# Altium PCB Template2.PcbDoc (part 1 of 2)
Units mm, origin at the board's own origin, x right, y up, seen from the top; angles counter-clockwise.
Board outline 93 x 70 mm, 4 copper layers (Top Layer, InternalPlane1, InternalPlane2, Bottom Layer), stack 1.963 mm thick; 187 components, 125 nets, 602 pads, 560 vias.
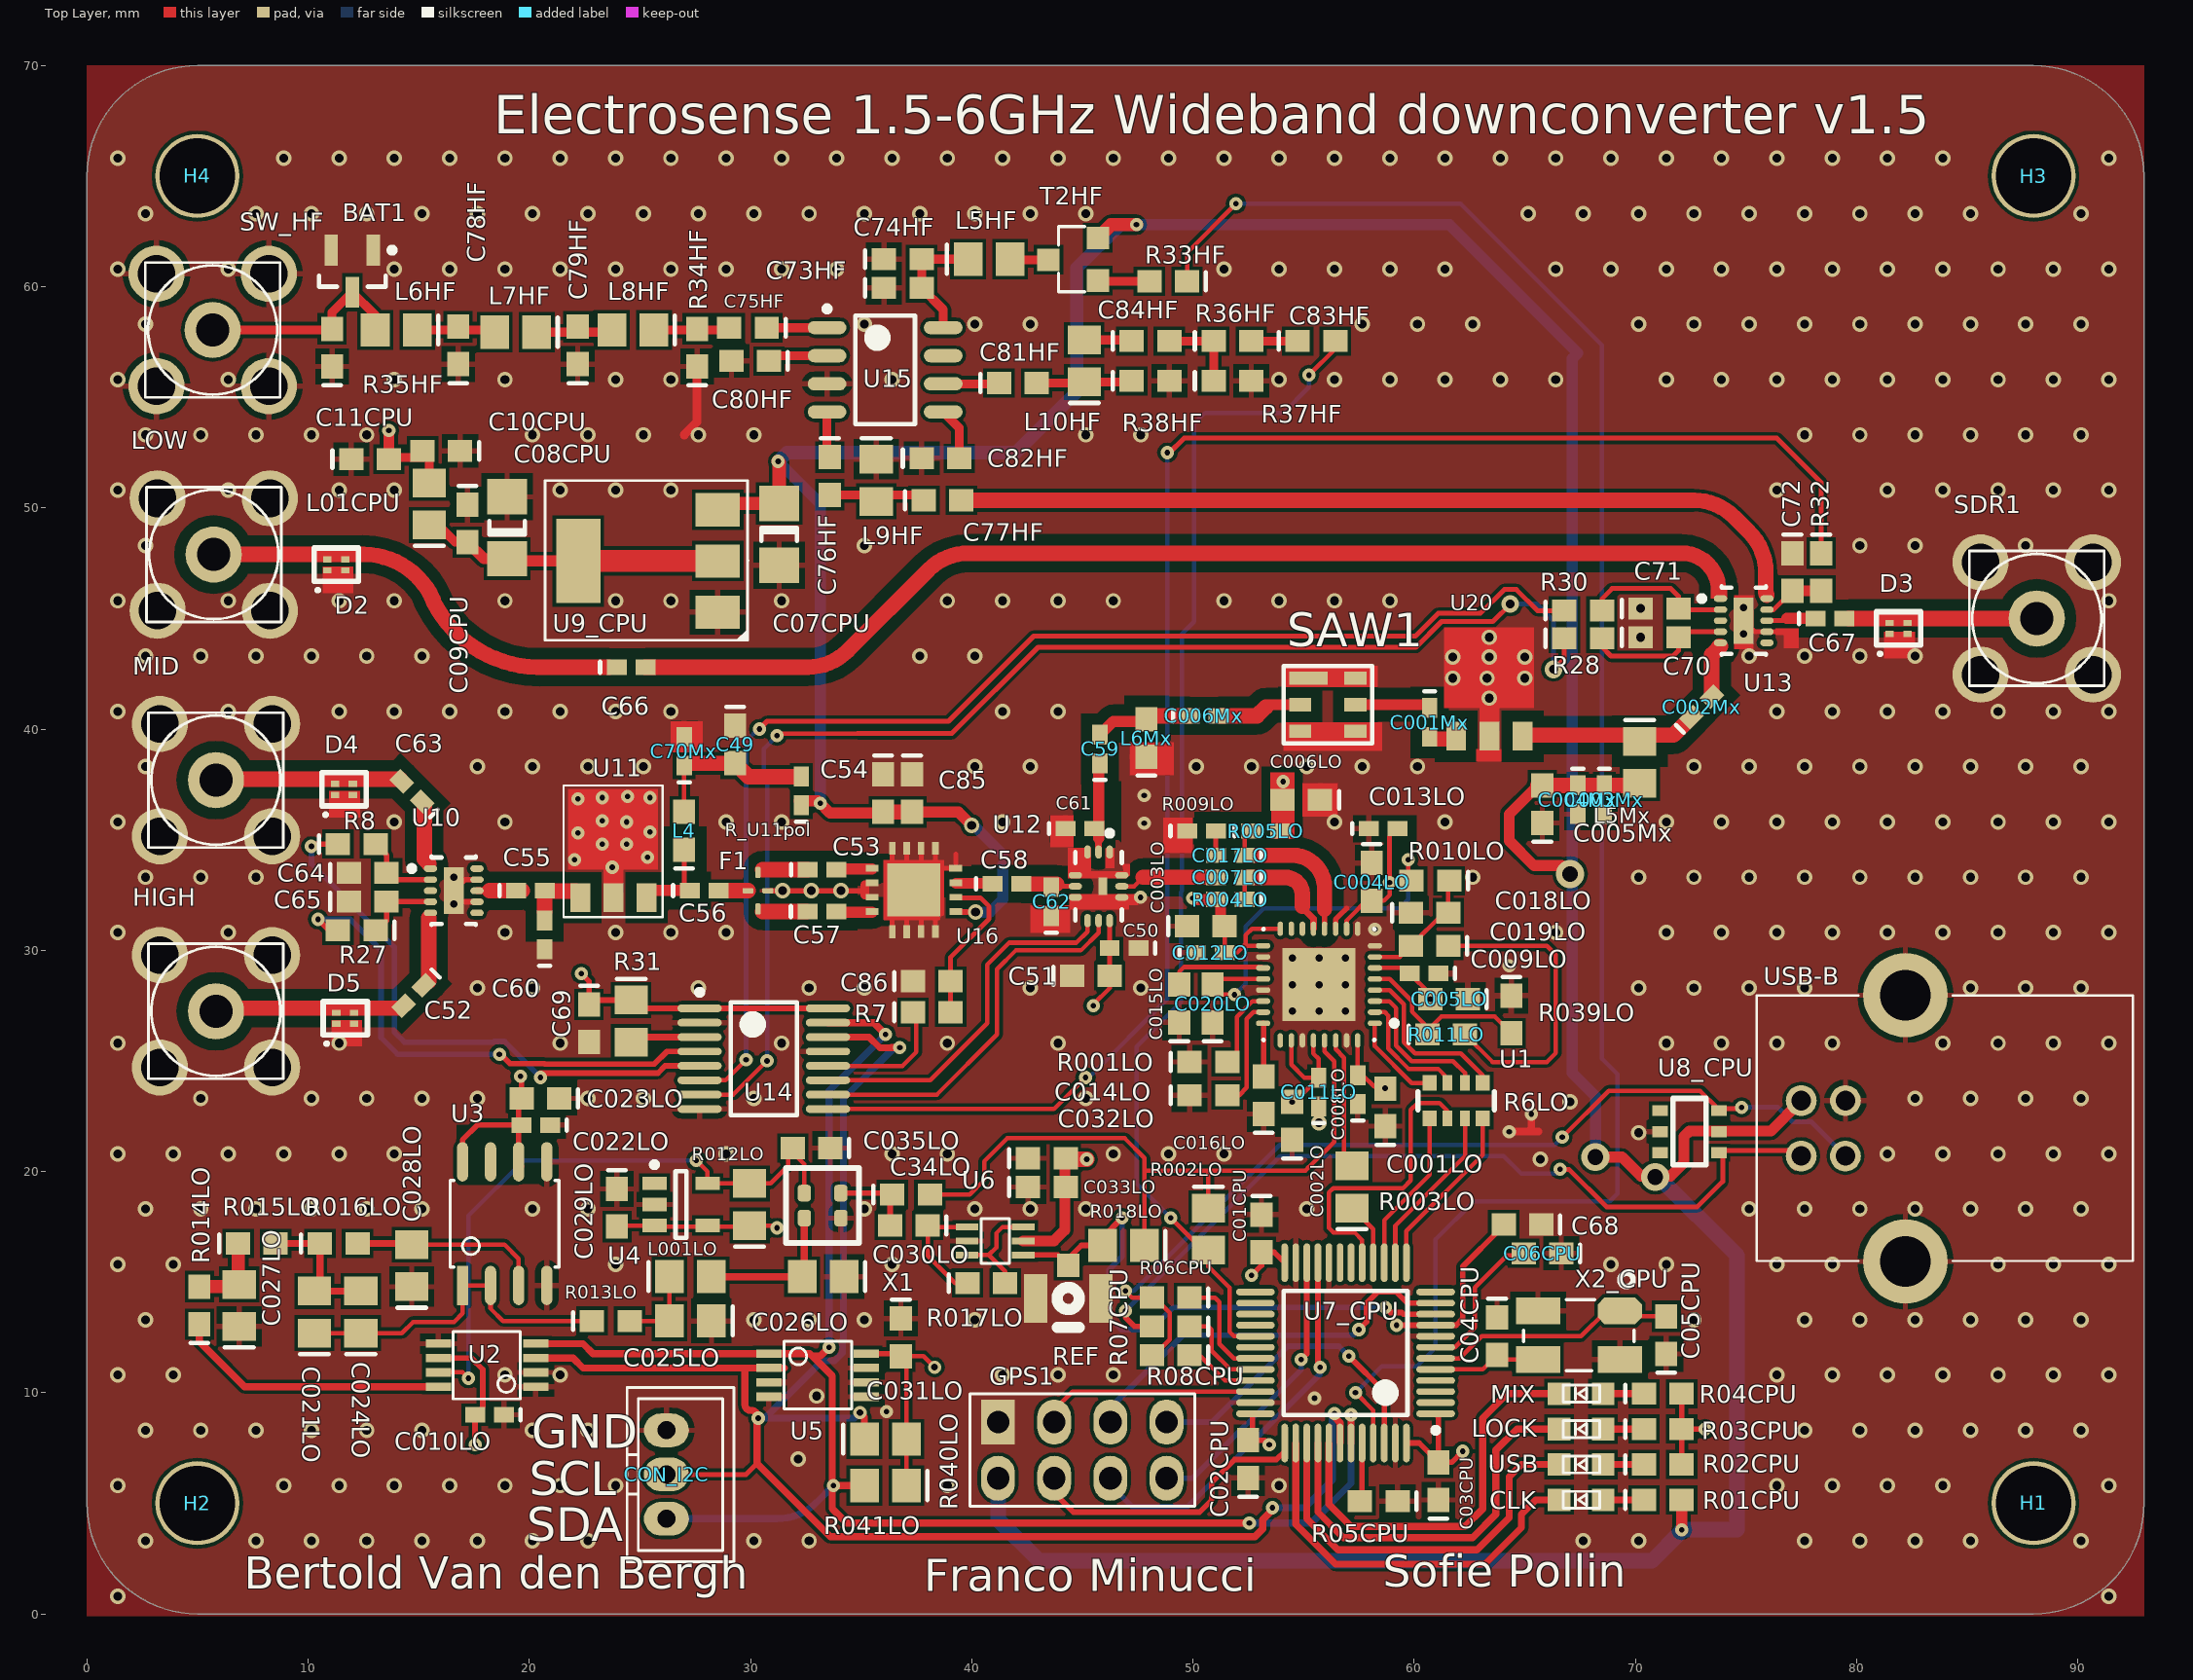
[diagram p0: Top Layer view]
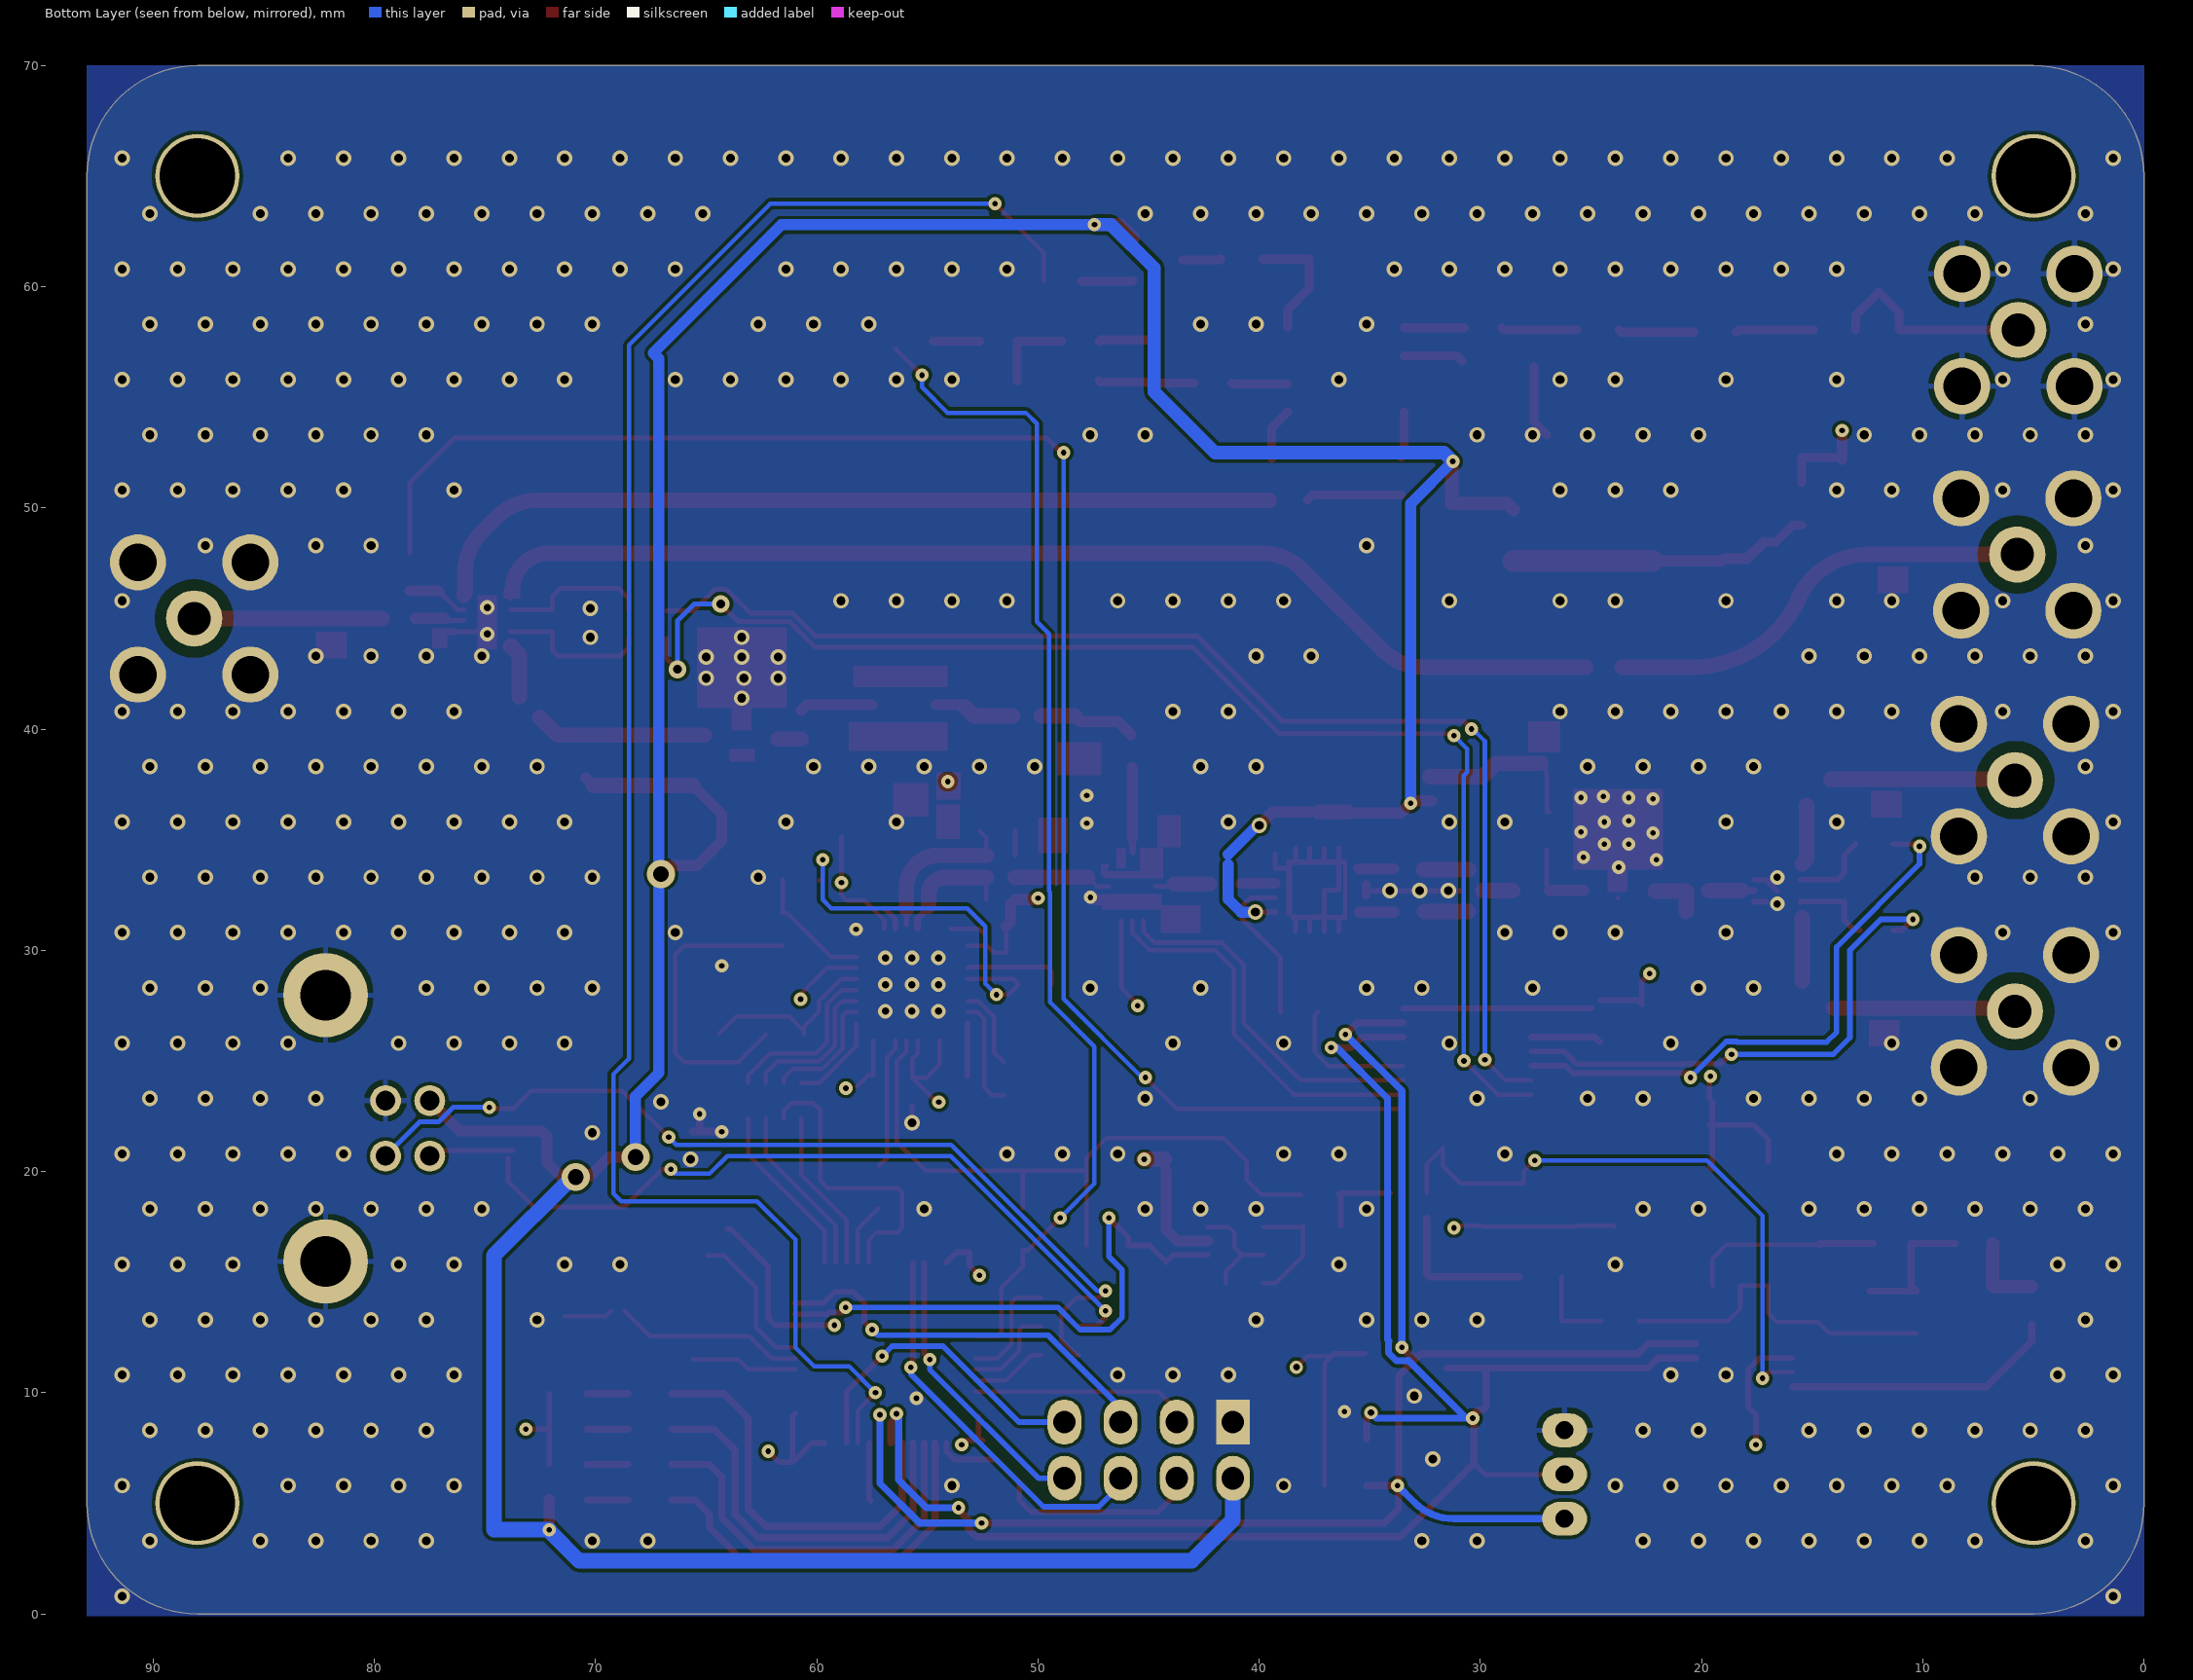
[diagram p1: Bottom Layer view, seen from below]
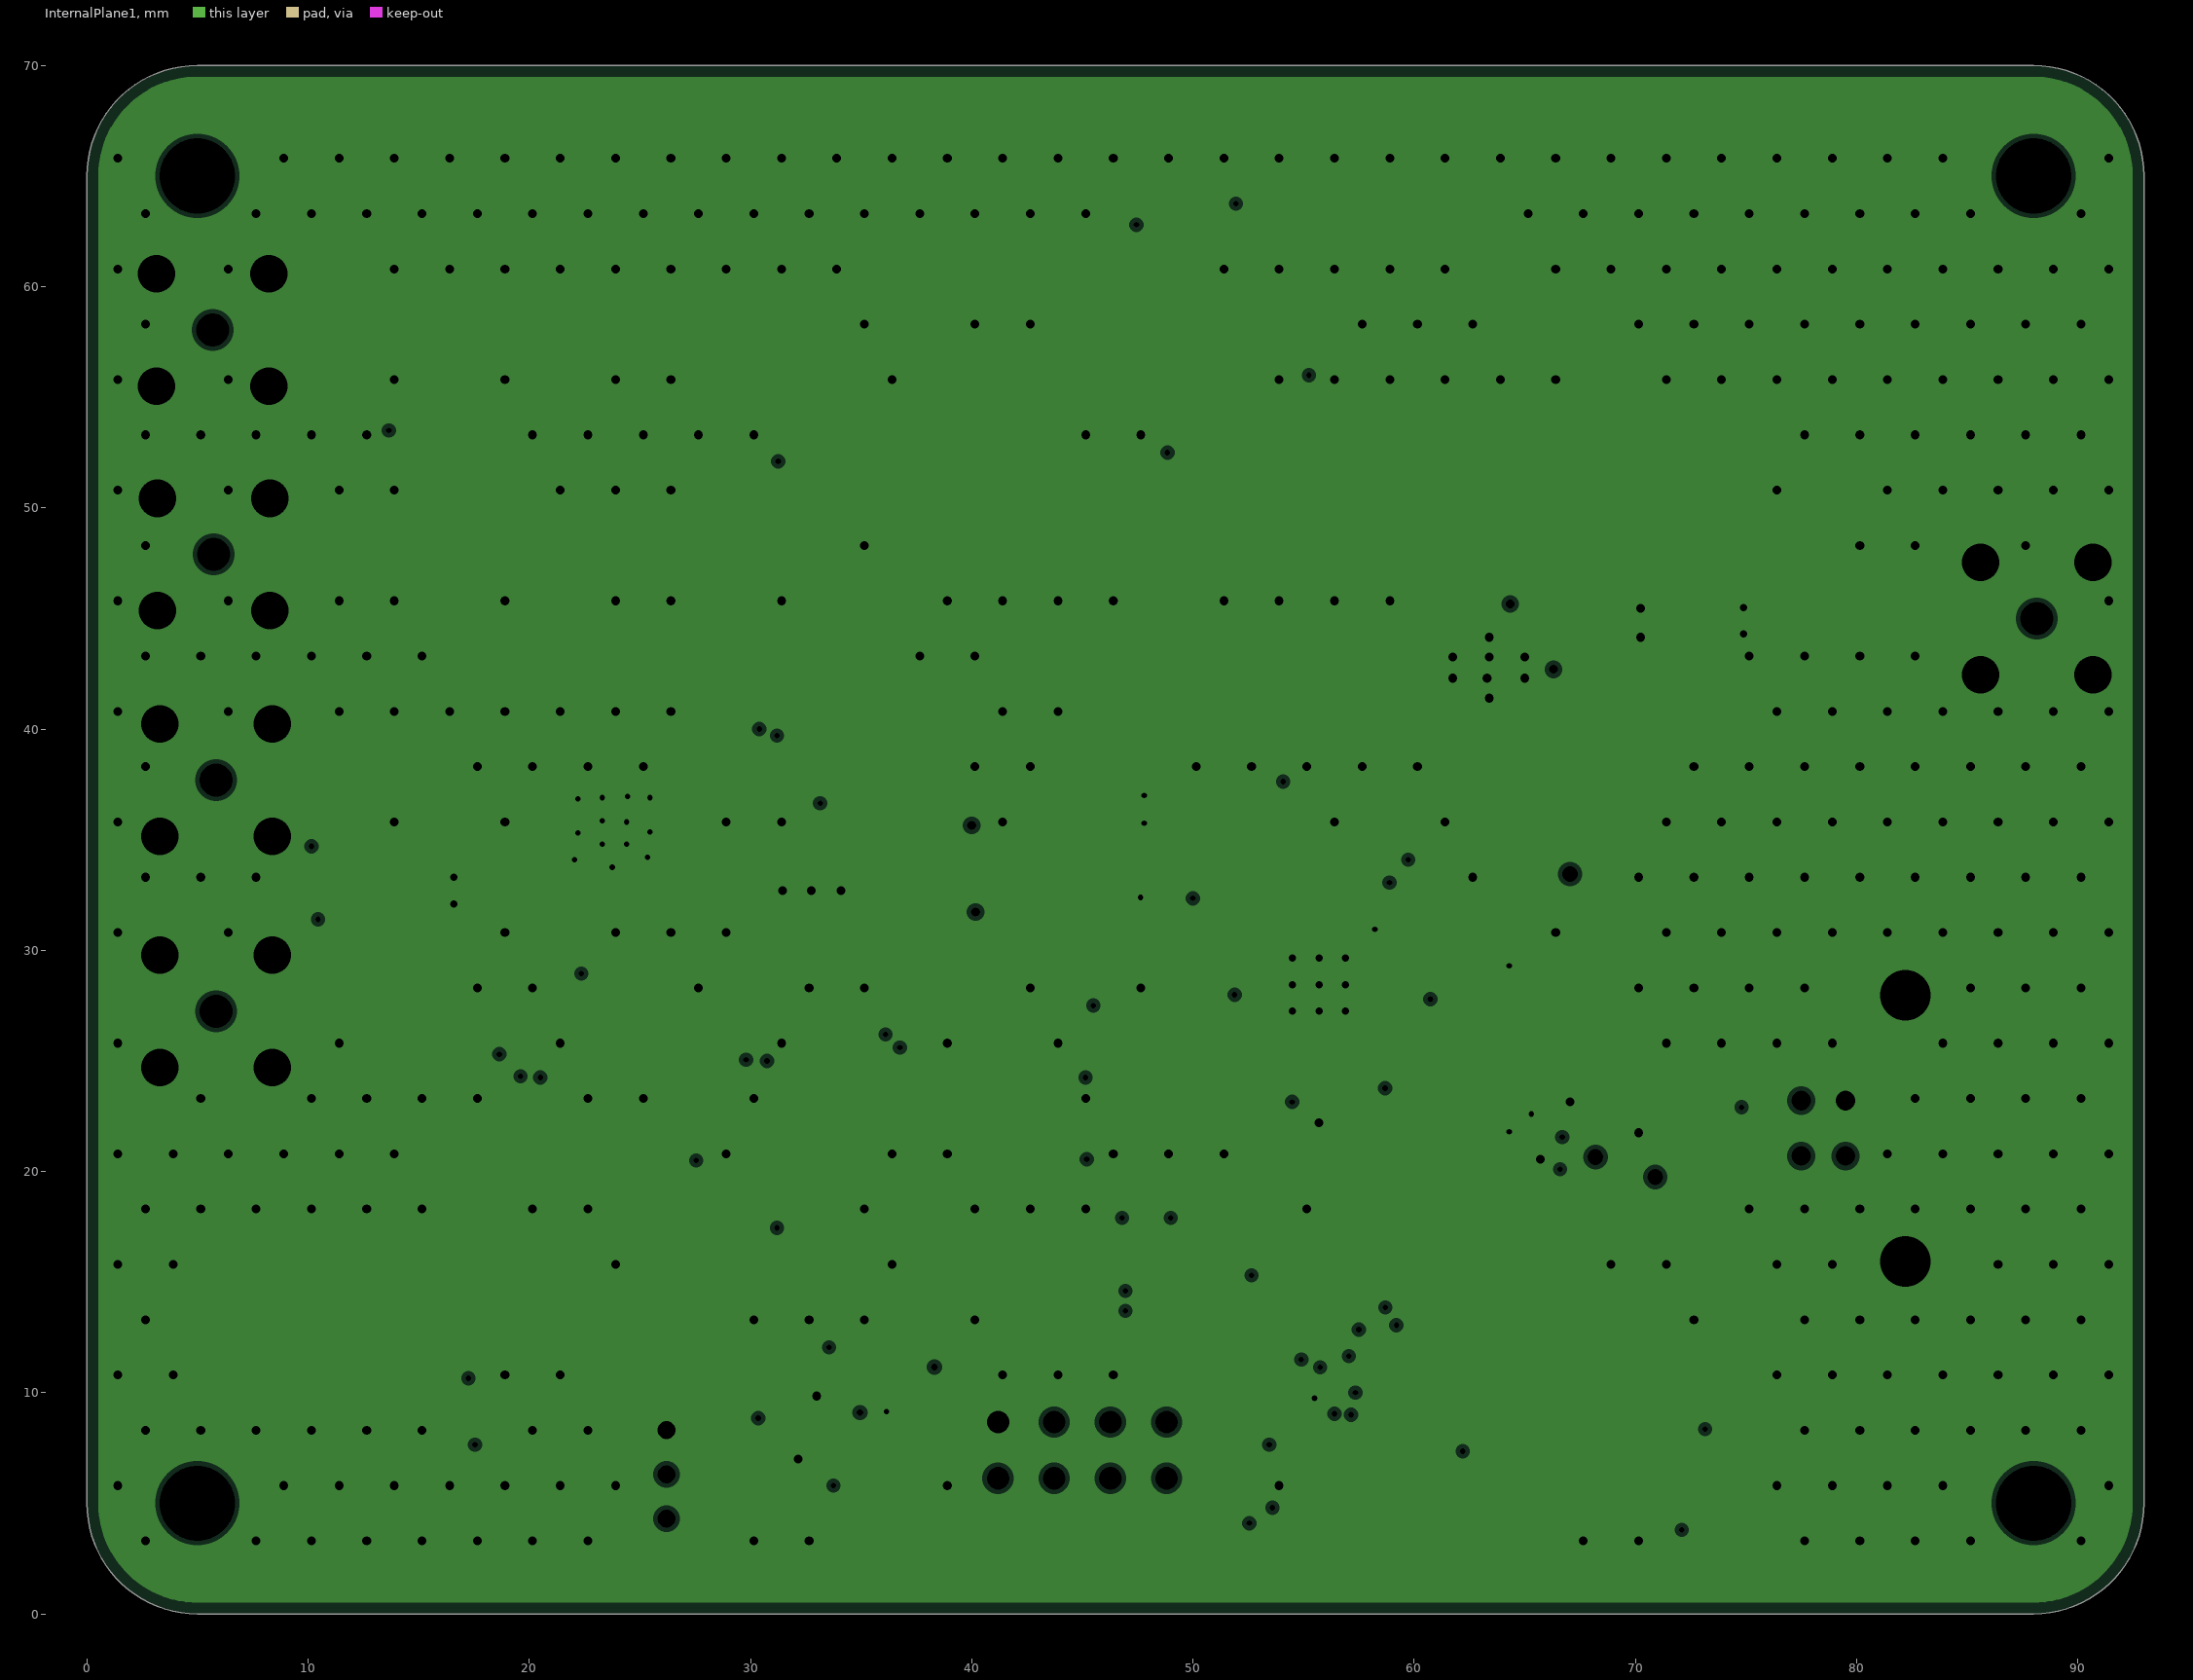
[diagram p2: InternalPlane1, clearances drawn from the general rule]
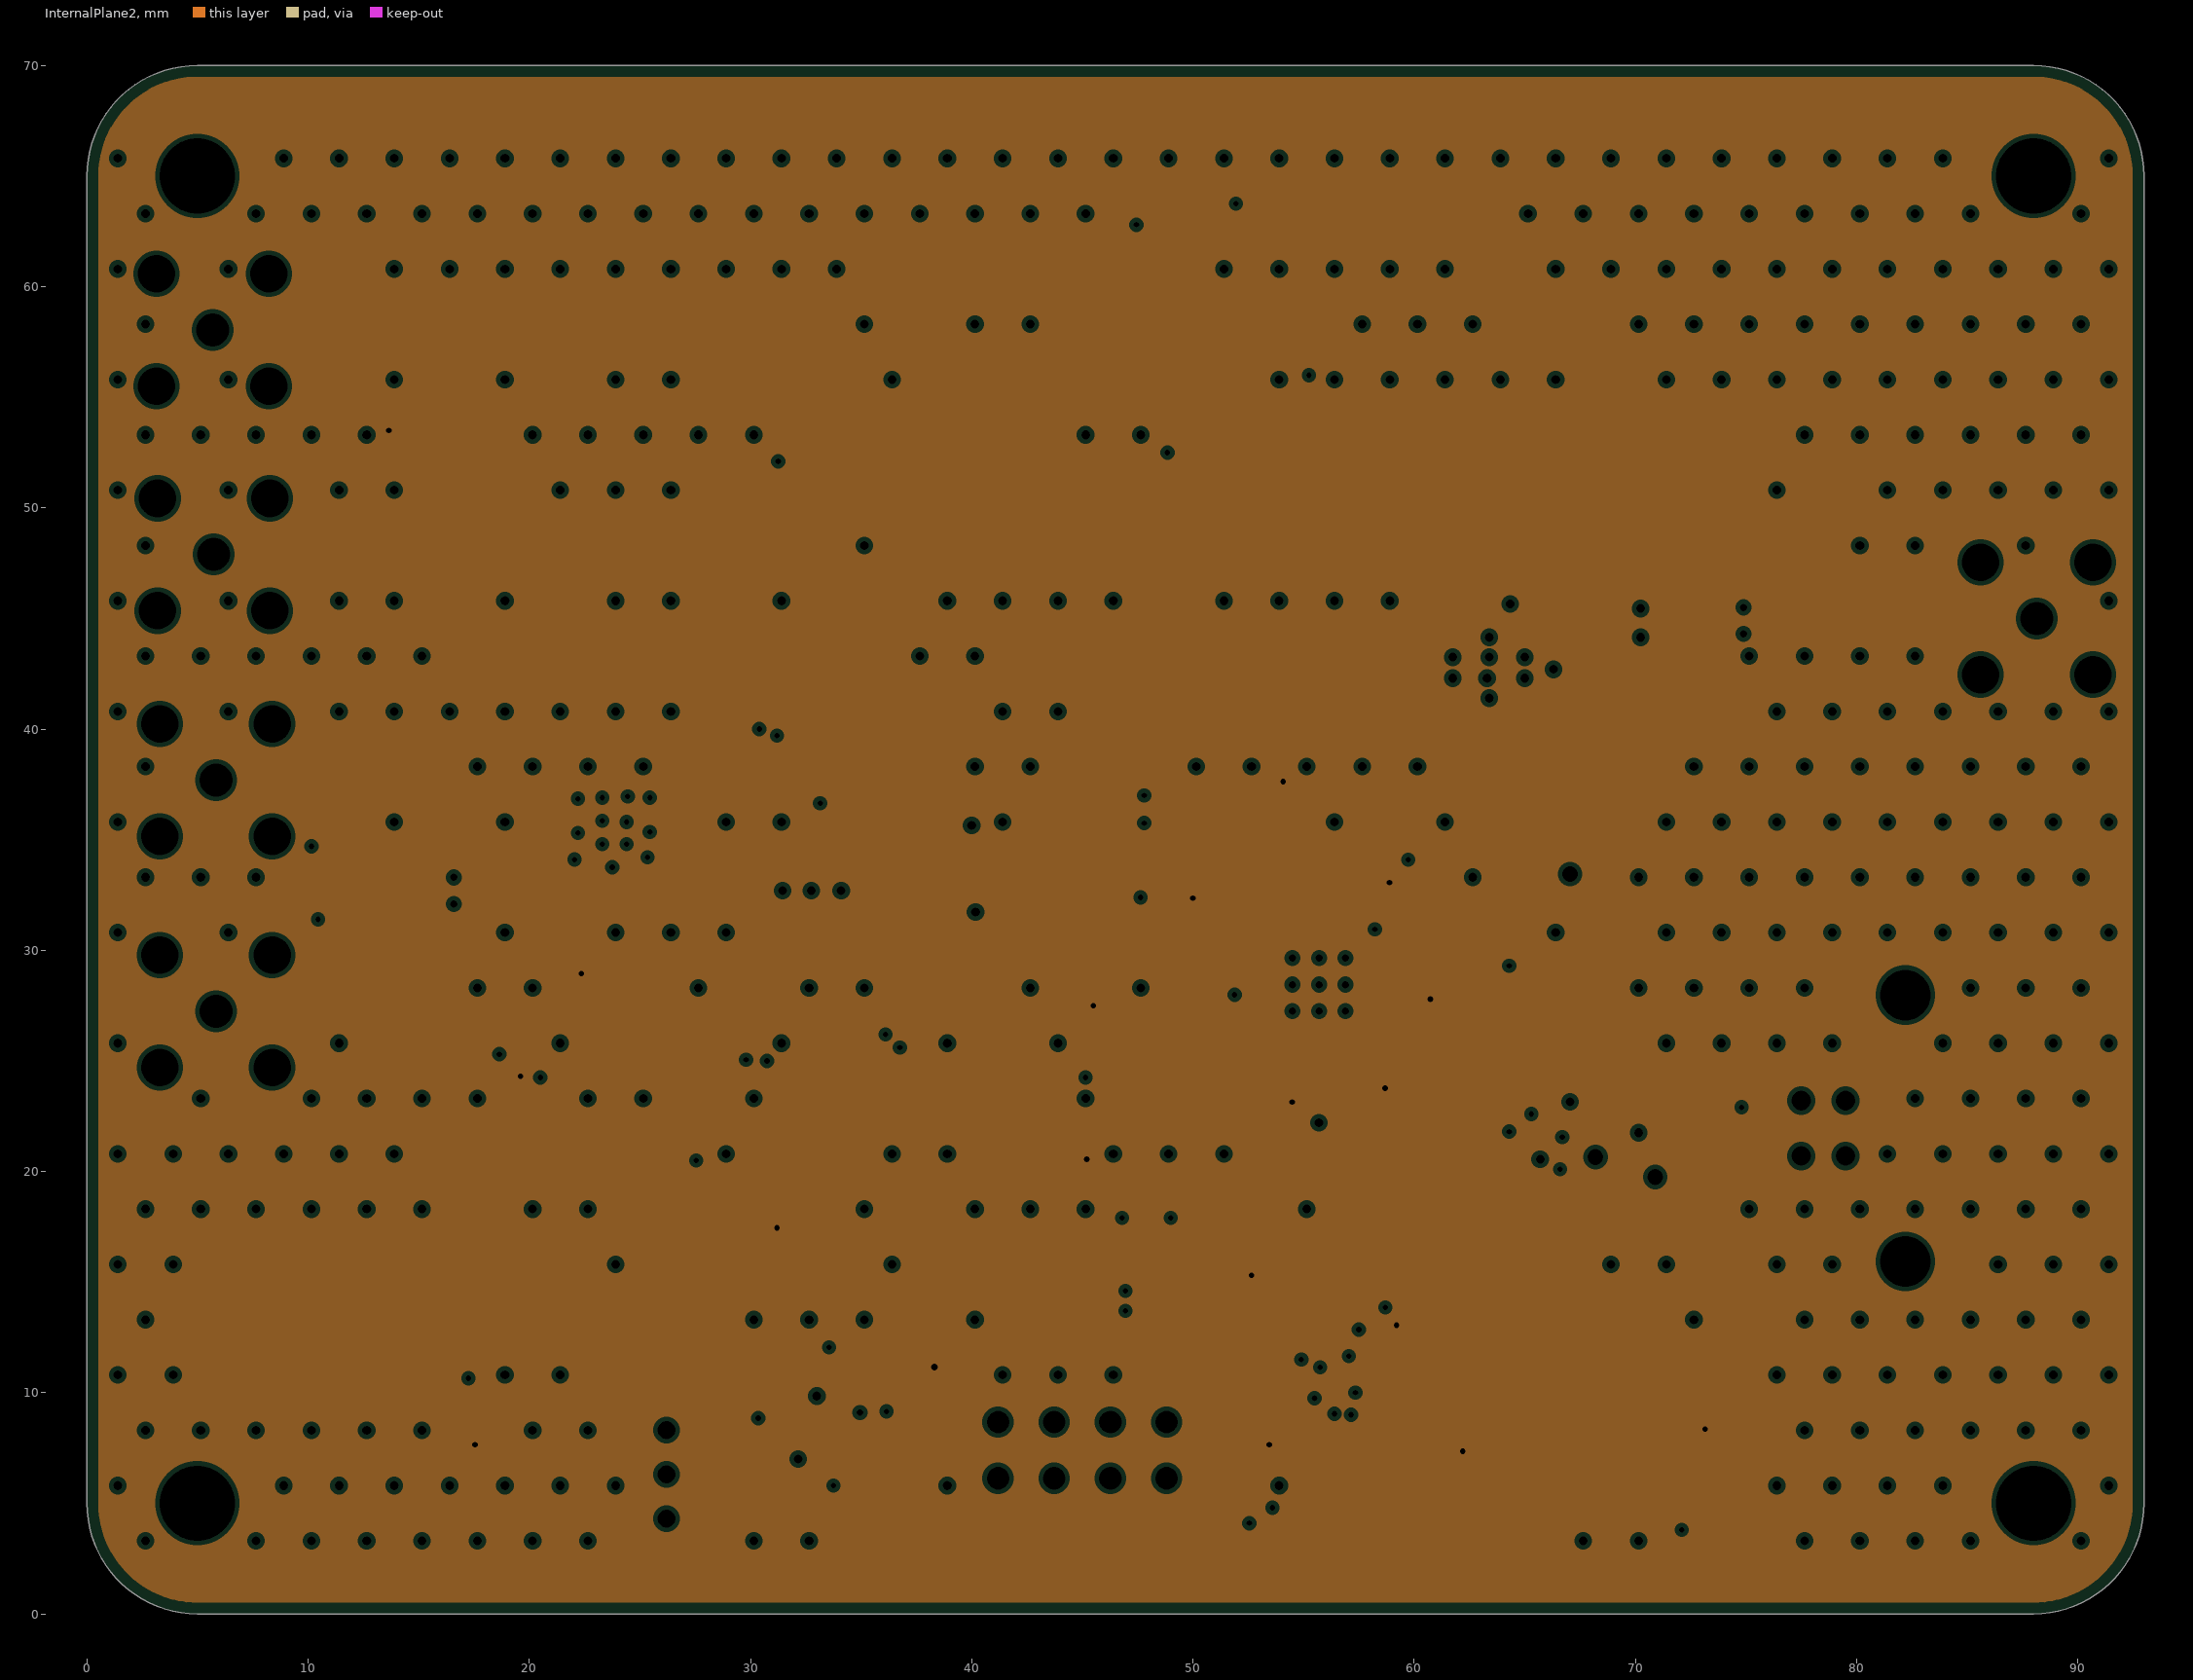
[diagram p3: InternalPlane2, clearances drawn from the general rule]

## Layer stack, top to bottom
Top Solder: solder mask 0.0102, Solder Resist, Dk 3.5
Top Layer: signal copper 0.0356
Dielectric1: core 0.36, FR-4, Dk 4.8
InternalPlane1: plane copper 0.036, net GND
Dielectric5: prepreg 1.1, FR-4, Dk 4.8
InternalPlane2: plane copper 0.036, net 3V3
Dielectric6: core 0.36, FR-4, Dk 4.8
Bottom Layer: signal copper 0.0356
Bottom Solder: solder mask 0.0102, Solder Resist, Dk 3.5

## Board outline
0,5 0,65 cw(c5,65) 5,70 88,70 cw(c88,65) 93,65 93,5 cw(c88,5) 88,0 5,0 cw(c5,5)

## Design rules (kind name [scope] priority, off if disabled: settings)
Clearance Clearance_1 [(InPolygon) vs InNetClass('RF')] p1: gap=0.5 ignorepadtopadclearanceinfootprint=FALSE except(0: Arc-Hole Track-Hole SMDPad-Hole THPad-Hole Via-Hole Fill-Hole Poly-Hole Region-Hole Text-Hole)
Clearance [All] p2: gap=0.15 ignorepadtopadclearanceinfootprint=FALSE except(0: Arc-Hole Track-Hole SMDPad-Hole THPad-Hole Via-Hole Fill-Hole Poly-Hole Region-Hole Text-Hole)
DiffPairsRouting [(InDifferentialPairClass('All Differential Pairs'))] p1: maxlimit=0.254 minlimit=0.254 mostfreqgap=0.254 toplayer_minwidth=0.381 toplayer_maxwidth=0.381 toplayer_prefwidth=0.381 bottomlayer_minwidth=0.381 bottomlayer_maxwidth=0.381 bottomlayer_prefwidth=0.381 maxuncoupledlength=12.7
HoleSize [All] p1: absolutevalues=TRUE maxlimit=3.5 minlimit=0.025 maxpercent=80.000 minpercent=20.000
MinimumAnnularRing [All] p1: minimumring=0.125
MinimumSolderMaskSliver [All] p1: minsoldermaskwidth=0
PlaneClearance [All] p1: clearance=0.2
PlaneConnect [All] p1: planeconnectstyle=Direct reliefexpansion=0.508 reliefentries=4 reliefconductorwidth=0.254 reliefairgap=0.254
PolygonConnect PolygonConnect_1 [(InPadClass('Direct') or isVia) vs InNet('GND')] p1: connectstyle=Direct reliefconductorwidth=0.254 reliefentries=4 polygonreliefangle="90 Angle" airgapwidth=0.254
PolygonConnect [All] p2: connectstyle=Relief reliefconductorwidth=0.254 reliefentries=4 polygonreliefangle="90 Angle" airgapwidth=0.254
RoutingVias [All] p1: holewidth=0.4 width=0.8 viastyle="Through Hole" minholewidth=0.25 minwidth=0.6 maxholewidth=2 maxwidth=2.5
SilkToSilkClearance [All] p1 off: silktosilkclearance=0.254
SilkToSolderMaskClearance SilkscreenOverComponentPads [IsPad] p1 off: minsilkscreentomaskgap=0.254 clearancetoexposedcopper=TRUE
SolderMaskExpansion [All] p1: expansion=0
Width [All] p1: maxlimit=2.54 minlimit=0.15 preferedwidth=0.22
23 further rules are at their usual default settings.

## Classes and differential pairs
component class Toplevel: H1 H2 H3 H4
net class RF: LO+ LO- Mixer_switch_in NetC001Mx_1 NetC001Mx_2 NetC002Mx_1 NetC006Mx_1 NetC006Mx_2 NetC52_1 NetC52_2 NetC53_1 NetC53_2 NetC55_1 NetC55_2 NetC56_1 NetC57_1 NetC57_2 NetC58_1 NetC58_2 NetC59_1 NetC63_1 NetC63_2 NetC66_1 NetC66_2 NetC67_1 NetC67_2 RFOUTA+ RFOUTA-
component class U_CPU: C01CPU C02CPU C03CPU C04CPU C05CPU C06CPU C07CPU C08CPU C09CPU C10CPU C11CPU CLK GPS1 L01CPU LOCK MIX R01CPU R02CPU R03CPU R04CPU R05CPU R06CPU R07CPU R08CPU U7_CPU U8_CPU U9_CPU USB USB-B X2_CPU
component class U_LO: C001LO C002LO C003LO C004LO C005LO C006LO C7 C007LO C008LO C009LO C010LO C011LO C012LO C013LO C14 C014LO C15 C015LO C016LO C017LO C18 C018LO C19 C019LO C20 C020LO C021LO C022LO C023LO C024LO C025LO C026LO C027LO C028LO C029LO C030LO C031LO C032LO C033LO C34LO C035LO L001LO R1 R001LO R2 R002LO R3 R003LO R4 R004LO R5 R005LO R6 R6LO R9 R009LO R10 R010LO R11 R011LO R12 R012LO R013LO R014LO R015LO R016LO R017LO R18 R018LO R039LO R040LO R041LO REF U1 U2 U3 U4 U5 U6 X1
component class U_MixerHF: BAT1 C73HF C74HF C75HF C76HF C77HF C78HF C79HF C80HF C81HF C82HF C83HF C84HF L5HF L6HF L7HF L8HF L9HF L10HF R33HF R34HF R35HF R36HF R37HF R38HF SW_HF T2HF U15
component class U_Mixer: C001Mx C002Mx C003Mx C004Mx C005Mx C006Mx C49 C50 C51 C52 C53 C54 C55 C56 C57 C58 C59 C60 C61 C62 C63 C64 C65 C66 C67 C68 C69 C70 C70Mx C71 C72 C85 C86 CON_I2C D2 D3 D4 D5 F1 HIGH L4 L5Mx L6Mx LOW MID R7 R8 R27 R28 R30 R31 R32 R_U11pol SAW1 SDR1 U10 U11 U12 U13 U14 U16 U20
pad class Direct: BAT1-1 BAT1-2 BAT1-3 C49-1 C49-2 C50-1 C50-2 C51-1 C51-2 C52-1 C52-2 C53-1 C53-2 C54-1 C54-2 C55-1 C55-2 C56-1 C56-2 C57-1 C57-2 C58-1 C58-2 C59-1 C59-2 C60-1 C60-2 C62-1 C62-2 C63-1 C63-2 C64-1 C64-2 C65-1 C65-2 C66-1 C66-2 C67-1 C67-2 C68-1 C68-2 C69-1 C69-2 C70-1 C70-2 C71-1 C71-2 C72-1 C72-2 C85-1 C85-2 C86-1 C86-2 CLK-1 CLK-2 D2-1 D2-2 D2-3 D2-4 D3-1 D3-2 D3-3 D3-4 D4-1 D4-2 D4-3 D4-4 D5-1 D5-2 D5-3 D5-4 F1-1 F1-2 F1-3 F1-4 GPS1-1 GPS1-2 GPS1-3 GPS1-4 GPS1-5 GPS1-6 GPS1-7 GPS1-8 H1-0 H2-0 H3-0 H4-0 HIGH-1 HIGH-2 HIGH-3 HIGH-4 HIGH-5 L4-1 L4-2 LOCK-1 LOCK-2 LOW-1 LOW-2 LOW-3 LOW-4 LOW-5 MID-1 MID-2 MID-3 MID-4 MID-5 MIX-1 MIX-2 R7-1 R7-2 R8-1 R8-2 R27-1 R27-2 R28-1 R28-2 R30-1 R30-2 R31-1 R31-2 R32-1 R32-2 REF-0 REF-1 SDR1-1 SDR1-2 SDR1-3 SDR1-4 SDR1-5 U1-1 U1-2 U1-3 U1-4 U1-5 U1-6 U1-7 U1-8 U1-9 U1-10 U1-11 U1-12 U1-13 U1-14 U1-15 U1-16 U1-17 U1-18 U1-19 U1-20 U1-21 U1-22 U1-23 U1-24 U1-25 U1-26 U1-27 U1-28 U1-29 U1-30 U1-31 U1-32 U1-33 U10-1 U10-2 U10-3 U10-4 U10-5 U10-6 U10-7 U10-8 U10-9 U10-10 U10-11 U11-1 U11-2 U11-3 U12-1 U12-2 U12-3 U12-4 U12-5 U12-6 U12-7 U12-8 U12-9 U12-10 U12-11 U12-12 U12-13 U13-1 U13-2 U13-3 U13-4 U13-5 U13-6 U13-7 U13-8 U13-9 U13-10 U13-11 U16-1 U16-2 U16-3 U16-4 U16-5 U16-6 U16-7 U16-8 U16-9 U16-10 U16-11 U16-12 U16-13 U16-14 U16-15 U16-16 U16-17 U20-1 U20-2 U20-3 USB-1 USB-2

## Components (designator, comment, footprint, x,y, rotation, side; value= is the part's Value field where it differs from the comment)
BAT1 "BAT1704WH6327XTSA1" SOT95P230X110-3N 12,60.7 r270 top
C01CPU "100nF" "smd C0603_0.80" 53.1,17.2 r270 top
C001LO "100nF" "smd C0603_0.80" 58.7,22.9 r90 top
C001Mx "CSMD402/100nF" "smd C0402" 60.7,40.3 r270 top
C02CPU "100nF" "smd C0603_0.80" 52.5,7 r90 top
C002LO "100nF" "smd C0603_0.80" 54.486,22.292 r90 top
C002Mx "CSMD402/100nF" "smd C0402" 73,41 r45 top
C03CPU "100nF" "smd C0603_0.80" 61.1,6 r90 top
C003LO "100nF" "smd C0603_0.80" 50.586,31.092 r0 top
C003Mx "CSMD402/1.5nF" "smd C0402" 68.6,36.8 r270 top
C04CPU "10pF" "smd C0603_0.80" 63.75,12.55 r270 top
C004LO "100nF" "smd C0603_0.80" 58.086,33.092 r270 top
C004Mx "CSMD402/100pF" "smd C0402" 67.4,36.8 r270 top
C05CPU "10pF" "smd C0603_0.80" 71.4,12.6 r90 top
C005LO "100nF" "smd C0603_0.80" 61.586,27.792 r180 top
C005Mx "1uF" "smd C0603_0.80" 65.8,36.6 r90 top
C06CPU "100nF" "smd C0603_0.80" 65.8,16.3 r180 top
C006LO "100nF" "smd C0603_0.80" 54.9,36.8 r180 top
C006Mx "CSMD402/100nF" "smd C0402" 50.5,40.6 r0 top
C07CPU "10uF" "smd C1206 polar" 31.3,48.8 r270 top
C007LO "22pF" "smd C0402" 51.686,33.292 r180 top
C08CPU "10uF" "smd C1206 polar" 19,49.1 r90 top
C008LO "10nF" "smd C0402" 57.45,23.7 r90 top
C09CPU "100nF" "smd C0603_0.80" 17.2,49.3 r270 top
C009LO "10nF" "smd C0402" 60.45,28.95 r180 top
C10CPU "100nF" "smd C0603_0.80" 16.025,52.575 r180 top
C010LO "10nF" "smd C0402" 18.2,9 r180 top
C11CPU "10nF" "smd C0603_0.80" 12.8,52.2 r0 top
C011LO "10nF" "smd C0402" 55.686,23.592 r90 top
C012LO "10nF" "smd C0402" 50.786,29.892 r0 top
C013LO "10nF" "smd C0402" 58.6,35.5 r0 top
C014LO "1uF" "smd C0603_0.80" 50.7,23.45 r0 top
C015LO "1uF" "smd C0603_0.80" 49.386,27.592 r90 top
C016LO "1uF" "smd C0603_0.80" 53.2,23.45 r90 top
C017LO "22pF" "smd C0402" 51.686,34.292 r180 top
C018LO "12nF" "smd C0603_0.80" 60.7,31.7 r0 top
C019LO "100nF" "smd C0603_0.80" 60.7,30.2 r180 top
C020LO "820pF" "smd C0603_0.80" 50.886,27.592 r90 top
C021LO "DNP" "smd C0805_1.30" 10.286,13.642 r90 top
C022LO "DNP" "smd C0402" 20.3,22.1 r180 top
C023LO "DNP" "smd C0603_0.80" 20.5,23.3 r180 top
C024LO "DNP" "smd C0805_1.30" 12.386,13.642 r90 top
C025LO "DNP" "smd C0805_0.60" 27.286,13.242 r180 top
C026LO "DNP" "smd C0805_0.60" 33.286,15.242 r180 top
C027LO "DNP" "smd C0805_1.30" 6.886,13.942 r90 top
C028LO "DNP" "smd C0805_0.60" 14.686,15.742 r90 top
C029LO "100nF" "smd C0603_0.80" 23.961,18.357 r270 top
C030LO "DNP" "smd C0603_0.80" 37.161,17.557 r180 top
C031LO "100nF" "smd C0603_0.80" 36.8,12.5 r270 top
C032LO "DNP" "smd C0603_0.80" 43.4,20.6 r0 top
C033LO "DNP" "smd C0603_0.80" 43.4,19.3 r0 top
C34LO "100nF" "smd C0603_0.80" 37.261,18.957 r0 top
C035LO "100nF" "smd C0603_0.80" 32.761,21.057 r180 top
C49 "100nF" "smd C0603_0.80" 29.3,39.3 r270 top
C50 "10nF" "smd C0402" 46.886,30.092 r180 top
C51 "100nF" "smd C0603_0.80" 45.386,28.842 r0 top
C52 "22pF" "smd C0402" 14.775,27.95 r225 top
C53 "22pF" "smd C0402" 33.236,33.642 r0 top
C54 "100nF" "smd C0603_0.80" 36,37.1 r270 top
C55 "22pF" "smd C0402" 20.05,32.692 r0 top
C56 "22pF" "smd C0402" 27.9,32.7 r0 top
C57 "22pF" "smd C0402" 33.225,31.75 r0 top
C58 "22pF" "smd C0402" 41.6,33 r0 top
C59 "100nF" "smd C0402" 45.8,39.1 r90 top
C60 "0.2pF" "smd C0402" 20.7,30.7 r90 top
C61 "DNP" "smd C0402" 44.9,35.5 r0 top
C62 "DNP" "smd C0402" 43.6,32.2 r90 top
C63 "22pF" "smd C0402" 14.7,37.175 r135 top
C64 "47pF" "smd C0603_0.80" 12.7,33.5 r0 top
C65 "47pF" "smd C0603_0.80" 12.7,32.2 r0 top
C66 "100pF" "smd C0402" 24.6,42.8 r0 top
C67 "100pF" "smd C0402" 78.8,45 r0 top
C68 "100nF" "smd C0603_0.80" 64.9,17.6 r180 top
C69 "100nF" "smd C0603_0.80" 22.7,26.7 r270 top
C70 "47pF" "smd C0603_0.80" 71.096,44.15 r0 top
C70Mx "CSMD402/1nF" "smd C0402" 27,39 r90 top
C71 "47pF" "smd C0603_0.80" 71.096,45.45 r0 top
C72 "47pF" "smd C0603_0.80" 77.1,47.1 r270 top
C73HF "10nF" "smd C0603_0.80" 36.886,59.942 r0 top
C74HF "100nF" "smd C0603_0.80" 36.886,61.242 r0 top
C75HF "10nF" "smd C0603_0.80" 29.886,58.142 r180 top
C76HF "47pF" "smd C0603_0.80" 33.586,51.442 r270 top
C77HF "6.8pF" "smd C0603_0.80" 38.686,50.342 r0 top
C78HF "47pF" "smd C0603_0.80" 16.786,57.342 r90 top
C79HF "47pF" "smd C0603_0.80" 22.186,57.342 r90 top
C80HF "10nF" "smd C0603_0.80" 29.986,56.642 r180 top
C81HF "10nF" "smd C0603_0.80" 42.086,55.642 r0 top
C82HF "47pF" "smd C0603_0.80" 38.586,52.242 r0 top
C83HF "47pF" "smd C0603_0.80" 55.586,57.542 r0 top
C84HF "9.1pF" "smd C0603_0.80" 48.086,57.542 r0 top
C85 "47pF" "smd C0603_0.80" 37.3,37.1 r270 top
C86 "47pF" "smd C0603_0.80" 38.2,28.6 r0 top
CLK "DNP" "led HSMH-C190 (Avago Technologies)" 67.546,5.154 r180 top
CON_I2C "CON HDR1X3/JST/B3BPHKS" "con HDR/BNR1x3 (pitch 2mm, JST B3B-PH-K-S)" 26.835,6.3 r270 top
D2 "ESD0P8RFL" ESD0P8RFL 11.275,47.425 r270 top
D3 "ESD0P8RFL" ESD0P8RFL 81.9,44.55 r270 top
D4 "ESD0P8RFL" ESD0P8RFL 11.625,37.275 r270 top
D5 "ESD0P8RFL" ESD0P8RFL 11.675,26.925 r270 top
F1 "DPX165850DT-8017A1" DPX165850DT-8017A1 30.336,32.692 r270 top
GPS1 "DNP" "hdr 2x4" 45,7.4 r0 top
H1 "MOUNTHOLE_3MM" MOUNT_3MM#1 90.5,5 r0 top
H2 "MOUNTHOLE_3MM" MOUNT_3MM#2 5,5 r0 top
H3 "MOUNTHOLE_3MM" MOUNT_3MM#1 90.5,65 r0 top
H4 "MOUNTHOLE_3MM" MOUNT_3MM#2 5,65 r0 top
HIGH "CONSMA" "con SMA (recht)"#1 5.836,27.242 r0 top
L01CPU "Ferrite" "smd C0805" 15.475,50.175 r90 top
L001LO "Ferrite" "smd C0805" 27.286,15.242 r0 top
L4 "SPL603/51nH" "smd C0603" 27,35.4 r90 top
L5HF "Ferrite" "smd C0805" 40.786,61.242 r0 top
L5Mx "SPL805/470nH" "smd C0805" 70.2,38.5 r270 top
L6HF "470nH" "smd C0805" 13.986,58.042 r180 top
L6Mx "DNP" "smd C0603" 47.9,39.6 r90 top
L7HF "470nH" "smd C0805" 19.386,57.942 r180 top
L8HF "470nH" "smd C0805" 24.686,58.042 r180 top
L9HF "470nH" "smd C0805" 35.686,51.242 r270 top
L10HF "470nH" "smd C0805" 45.086,56.642 r90 top
LOCK "HSMG-C190" "led HSMH-C190 (Avago Technologies)" 67.546,8.354 r180 top
LOW "CONSMA" "con SMA (recht)"#2 5.736,47.892 r0 top
MID "CONSMA" "con SMA (recht)"#1 5.836,37.692 r0 top
MIX "HSMY-C190" "led HSMH-C190 (Avago Technologies)" 67.546,9.954 r180 top
R01CPU "DNP" "smd C0603_0.45" 71.246,5.154 r0 top
R001LO "5K1" "smd C0603_0.45" 50.7,24.95 r0 top
R02CPU "750" "smd C0603_0.45" 71.246,6.754 r0 top
R002LO "" "smd C0805_0.50" 50.7,17.4 r270 top
R03CPU "750" "smd C0603_0.45" 71.246,8.354 r0 top
R003LO "270" "smd C0805_0.50" 57.2,19.3 r90 top
R04CPU "750" "smd C0603_0.45" 71.246,9.954 r0 top
R004LO "50" "smd C0402_0.35" 51.686,32.292 r180 top
R05CPU "1K5" "smd C0603_0.45" 58.4,5.1 r180 top
R005LO "50" "smd C0402_0.35" 53.286,35.392 r0 top
R06CPU "1K5" "smd C0603_0.45" 49,14.3 r180 top
R6LO "DNP" "smd R EXB38v" 61.9,23.2 r0 top
R7 "750" "smd C0603_0.45" 38.2,27.2 r0 top
R07CPU "51" "smd C0603_0.45" 49,13 r180 top
R8 "51" "smd C0603_0.45" 12.2,34.8 r0 top
R08CPU "51" "smd C0603_0.45" 49,11.7 r180 top
R009LO "50" "smd C0402_0.35" 50.386,35.392 r0 top
R010LO "240" "smd C0603_0.45" 60.736,33.142 r180 top
R011LO "30.1" "smd C0603_0.45" 61.45,26.2 r0 top
R012LO "0" "smd C0805_0.50" 29.961,18.507 r90 top
R013LO "DNP" "smd C0603_0.45" 23.686,13.242 r0 top
R014LO "DNP" "smd C0603_0.45" 5.086,13.942 r90 top
R015LO "DNP" "smd C0603_0.45" 7.686,16.742 r0 top
R016LO "DNP" "smd C0603_0.45" 11.386,16.742 r0 top
R017LO "DNP" "smd C0603_0.45" 40.661,14.957 r0 top
R018LO "DNP" "smd C0805_0.50" 46.861,16.657 r180 top
R27 "51" "smd C0603_0.45" 12.2,30.9 r180 top
R28 "51" "smd C0603_0.45" 67.641,44.1 r0 top
R30 "51" "smd C0603_0.45" 67.641,45.354 r0 top
R31 "1K5" "smd C0805_0.50" 24.6,26.8 r270 top
R32 "51" "smd C0603_0.45" 78.4,47.1 r270 top
R33HF "10K" "smd C0603_0.45" 48.886,60.242 r180 top
R34HF "51" "smd C0603_0.45" 27.586,57.242 r90 top
R35HF "10K" "smd C0603_0.45" 11.086,57.242 r90 top
R36HF "390" "smd C0603_0.45" 51.786,57.542 r0 top
R37HF "51" "smd C0603_0.45" 51.786,55.742 r0 top
R38HF "51" "smd C0603_0.45" 48.086,55.742 r0 top
R039LO "91" "smd C0603_0.45" 64.4,27.1 r270 top
R040LO "" "smd C0805_0.50" 36.1,7.9 r0 top
R041LO "" "smd C0805_0.50" 36.1,5.8 r180 top
R_U11pol "20R/402" "smd C0402_0.35" 32.3,37.2 r90 top
REF "DNP" "smd U.FL" 44.361,14.257 r0 top
SAW1 "BR39162B3522U410" SAW_package 56.1,41.1 r90 top
SDR1 "CONSMA" "con SMA (recht)"#3 88.15,45 r0 top
SW_HF "CONSMA" "con SMA (recht)"#2 5.686,58.042 r0 top
T2HF "BC856" "smd SOT-23" 44.586,61.242 r90 top
U1 "MAX2870" MAXIM-T3255 55.7,28.45 r180 top
U2 "DNP" "smd MSOP/8" 18.086,11.242 r90 top
U3 "DNP" "smd soicn/8" 18.886,17.642 r0 top
U4 "DNP" "SO23-5 TI" 26.861,18.507 r0 top
U5 "MCP9804" "smd MSOP/8" 33.036,10.792 r270 top
U6 "DNP" "SMD SC-70 (6-pin)" 41.061,16.857 r270 top
U7_CPU "STM32F103C8T6" TSQFP50P900X900X160-48N 56.9,11.8 r180 top
U8_CPU "IP4220CZ6" "smd SOT-457" 72.45,21.8 r270 top
U9_CPU "LD1117-SOT223" SOT223 25.8,47.6 r90 top
U10 "SKY13322-375LF" QFN50P200X300X80-10N 16.586,32.692 r0 top
U11 "SBB3089Z" LFCSP 23.8,34.8 r0 top
U12 "LTC5549" LTC5549 45.736,32.892 r270 top
U13 "SKY13322-375LF" QFN50P200X300X80-10N 74.9,44.9 r0 top
U14 "TCA6408A" TSOP65P640X100-16M 30.6,25.1 r0 top
U15 "SA612" SOIC127P600X175-8N 36.086,56.242 r0 top
U16 "SKY13286-359LF" QFN-16_skyworks 37.387,32.727 r180 top
U20 "ADL5602" LFCSP 63.4,42.1 r0 top
USB "HSMH-C190" "led HSMH-C190 (Avago Technologies)" 67.546,6.754 r180 top
USB-B "USB-B" USB-B 77.5,23.2 r90 top
X1 "X1G004691000112" X1G004691000112 33.261,18.457 r0 top
X2_CPU "KTL/5x3.2mm16MHz" "smd KTL 5x3.2" 69.3,13.7 r180 top

## Footprints (in the part's own frame and the unit in brackets; to place one, negate y for a bottom-side part, rotate by r counter-clockwise, add the part's x,y. Pads: shape width x height; smd on the part's side, far side on the other; paste and mask are expansions set on the pad)
"con HDR/BNR1x3 (pitch 2mm, JST B3B-PH-K-S)" [mil]
  oval 60x80 / inner round 0 / far side oval 60x80 hole 32 paste+0 mask+0: 1(78.74,-25) 2(0,-25) 3(-78.74,-25)
  silkscreen extent -155,-95 155,95
"con SMA (recht)"#1 [mil]
  round 100 / inner round 60 / far side round 100 hole 59 paste+0 mask+0: 1(0,0)
  round 100 / inner round 60 / far side round 100 hole 67 paste+0 mask+0: 2(-100,100) 3(-100,-100)
  round 100 / inner round 0 / far side round 100 hole 67 paste+0 mask+0: 4(100,-100) 5(100,100)
  silkscreen extent -120,-120 120,120
"con SMA (recht)"#2 [mil]
  round 100 / inner round 60 / far side round 100 hole 59 paste+0 mask+0: 1(0,0)
  round 100 / inner round 60 / far side round 100 hole 67 paste+0 mask+0: 2(-100,100) 3(-100,-100) 4(100,-100) 5(100,100)
  silkscreen extent -120,-120 120,120
"con SMA (recht)"#3 [mil]
  round 100 / inner round 0 / far side round 100 hole 59 paste+0 mask+0: 1(0,0)
  round 100 / inner round 0 / far side round 100 hole 67 paste+0 mask+0: 2(-100,100) 3(-100,-100) 4(100,-100) 5(100,100)
  silkscreen extent -120,-120 120,120
DPX165850DT-8017A1 [mm]
  rrect50% 0.5x0.25 smd: 1(-0.825,0) 3(0.825,0)
  rrect50% 0.25x0.5 smd: 2(0,-0.45) 4(0,0.45)
ESD0P8RFL [mm]
  rect 0.28x0.38 smd: 1(0.25,-0.4) 2(0.25,0.4) 3(-0.25,0.4) 4(-0.25,-0.4)
  silkscreen extent -0.76,-1 1.17,1
"hdr 2x4" [mil]
  rect 60x80 / inner round 0 / far side rect 60x80 hole 40 paste+0 mask+0: 1(-150,50)
  oval 60x80 / inner round 0 / far side oval 60x80 hole 40 paste+0 mask+0: 2(-150,-50) 3(-50,50) 4(-50,-50) 5(50,50) 6(50,-50) 7(150,50) 8(150,-50)
  silkscreen extent -200,-100 200,100
"led HSMH-C190 (Avago Technologies)" [mil]
  rect 40x40 smd paste+0 mask+0: 1(-39,0) 2(39,0)
  silkscreen extent -33,-15 32,15
LFCSP [mm]
  rect 0.9x1.3 smd: 1(-1.5,-2.425) 2(0,-2.425) 3(1.5,-2.425)
  Top Layer region: -2.05,-1.15 2.025,-1.15 2.025,2.5 -2.05,2.5
  Top Layer region: -0.45,-2.175 0.45,-2.175 0.45,-1.075 -0.45,-1.075
  silkscreen extent -2.25,-3.3 2.22,2.65
LTC5549 [mm] "QFN, 12-Leads, Body 2,1x3,1mm (max), Pitch 0,50mm, IPC Medium Density"
  oval 0.6x0.3 smd: 1(-1.55,0.5) 2(-1.55,0) 3(-1.55,-0.5) 7(1.55,-0.5) 8(1.55,0) 9(1.55,0.5)
  oval 0.3x0.6 smd: 4(-0.5,-1.05) 5(0,-1.05) 6(0.5,-1.05) 10(0.5,1.05) 11(0,1.05) 12(-0.5,1.05)
  rect 0.8x0.4 smd: 13(0,0.2)
  silkscreen extent -2.52,-1.05 1.55,1.05, body extent -1.55,-1.05 1.55,1.05, height 0.8
MAXIM-T3255 [mm] "QFN, 32-Leads, Body 5,0x5,0mm (max), Pitch 0,50mm, IPC Medium Density"
  oval 0.65x0.25 smd: 1(-2.525,1.75) 2(-2.525,1.25) 3(-2.525,0.75) 4(-2.525,0.25) 5(-2.525,-0.25) 6(-2.525,-0.75) 7(-2.525,-1.25) 8(-2.525,-1.75) 17(2.525,-1.75) 18(2.525,-1.25) 19(2.525,-0.75) 20(2.525,-0.25) 21(2.525,0.25) 22(2.525,0.75) 23(2.525,1.25) 24(2.525,1.75)
  oval 0.25x0.65 smd: 9(-1.75,-2.525) 10(-1.25,-2.525) 11(-0.75,-2.525) 12(-0.25,-2.525) 13(0.25,-2.525) 14(0.75,-2.525) 15(1.25,-2.525) 16(1.75,-2.525) 25(1.75,2.525) 26(1.25,2.525) 27(0.75,2.525) 28(0.25,2.525) 29(-0.25,2.525) 30(-0.75,2.525) 31(-1.25,2.525) 32(-1.75,2.525)
  rect 3.3x3.3 smd: 33(0,0)
  silkscreen extent -3.53,-2.52 2.52,2.53, body extent -2.5,-2.5 2.5,2.5, height 1
MOUNT_3MM#1 [mm]
  round 3.8 hole 3.4 paste-100 mask-100: 0(-2.5,0)
MOUNT_3MM#2 [mm]
  round 3.8 hole 3.4 paste-100 mask-100: 0(0,0)
QFN50P200X300X80-10N [mm] "QFN, 10-Leads, Body 3,0x2,0mm (max), Pitch 0,50mm, IPC Medium Density"
  oval 0.6x0.3 smd: 1(-1.05,1) 2(-1.05,0.5) 3(-1.05,0) 4(-1.05,-0.5) 5(-1.05,-1) 6(1.05,-1) 7(1.05,-0.5) 8(1.05,0) 9(1.05,0.5) 10(1.05,1)
  rect 0.9x2.1 smd: 11(0,0)
  silkscreen extent -2.02,-1.55 1,1.55, body extent -1,-1.5 1,1.5, height 0.8
QFN-16_skyworks [mm]
  rect 0.575x0.3 smd: 1(-1.887,0.975) 2(-1.887,0.324) 3(-1.887,-0.325) 4(-1.887,-0.975) 9(1.887,-0.975) 10(1.887,-0.325) 11(1.887,0.327) 12(1.889,0.975)
  rect 0.3x0.575 smd: 5(-0.975,-1.886) 6(-0.325,-1.888) 7(0.325,-1.888) 8(0.975,-1.888) 13(0.975,1.889) 14(0.325,1.889) 15(-0.326,1.887) 16(-0.975,1.888)
  rect 2.4x2.4 smd: 17(0,0)
  Top Layer region: -1.15,1.125 1.35,1.125 1.35,1.35 -1.15,1.35
  Top Layer region: 1.175,-1.35 1.35,-1.35 1.35,1.125 1.175,1.125
  Top Layer region: -1.35,-1.35 1.175,-1.35 1.175,-1.125 -1.35,-1.125
  Top Layer region: -1.35,-1.225 -1.125,-1.225 -1.125,1.15 -1.35,1.15
  Top Layer region: -1.306,1.15 -1.19,1.15 -1.19,1.156 -1.306,1.156
  Top Layer region: -1.289,1.154 -1.188,1.154 -1.188,1.162 -1.289,1.162
  Top Layer region: -1.269,1.157 -1.182,1.157 -1.182,1.169 -1.269,1.169
  Top Layer region: -1.257,1.166 -1.175,1.166 -1.175,1.175 -1.257,1.175
  Top Layer region: -1.245,1.173 -1.181,1.173 -1.181,1.181 -1.245,1.181
  Top Layer region: -1.24,1.178 -1.185,1.178 -1.185,1.185 -1.24,1.185
  Top Layer region: -1.231,1.183 -1.19,1.183 -1.19,1.191 -1.231,1.191
  Top Layer region: -1.223,1.187 -1.193,1.187 -1.193,1.195 -1.223,1.195
  Top Layer region: -1.219,1.187 -1.187,1.187 -1.187,1.202 -1.219,1.202
  Top Layer region: -1.213,1.197 -1.149,1.197 -1.149,1.209 -1.213,1.209
  Top Layer region: -1.205,1.201 -1.124,1.201 -1.124,1.214 -1.205,1.214
  Top Layer region: -1.198,1.203 -1.119,1.203 -1.119,1.222 -1.198,1.222
  Top Layer region: -1.192,1.214 -1.127,1.214 -1.127,1.231 -1.192,1.231
  Top Layer region: -1.184,1.22 -1.131,1.22 -1.131,1.24 -1.184,1.24
  Top Layer region: -1.18,1.229 -1.131,1.229 -1.131,1.247 -1.18,1.247
  Top Layer region: -1.178,1.235 -1.13,1.235 -1.13,1.251 -1.178,1.251
  Top Layer region: -1.171,1.246 -1.133,1.246 -1.133,1.267 -1.171,1.267
  Top Layer region: -1.163,1.259 -1.142,1.259 -1.142,1.283 -1.163,1.283
  Top Layer region: -1.157,1.276 -1.146,1.276 -1.146,1.305 -1.157,1.305
  Top Layer lines w0.01: 1.35,1.35 1.35,-1.35 0.975,-1.35 0.325,-1.35 -0.325,-1.35 -0.975,-1.35 -1.35,-1.35 -1.35,-0.975 -1.35,-0.909 -1.35,1.15 ccw(c-1.35,1.35) -1.15,1.35 -0.975,1.35 -0.326,1.35 0.325,1.35 0.975,1.35 1.35,1.35
SAW_package [mm]
  rect 0.6x1.75 smd: 1(1.2,0.875)
  rect 0.6x1 smd: 2(0,1.25) 2(0,1.25) 3(-1.2,1.25) 4(-1.2,-1.25) 5(0,-1.25) 6(1.2,-1.25)
  silkscreen extent -1.75,-2 1.75,2
"smd C0402" [mm] "Chip Capacitor; Body 1.0 x 0.5 mm (LxW typ)"
  rect 0.9x0.7 smd: 1(-0.65,0) 2(0.65,0)
  silkscreen extent -1.4,-0.25 -1.4,0.25
"smd C0402_0.35" [mm] "Chip Capacitor; Body 1.0 x 0.5 mm (LxW typ)"
  rect 0.9x0.7 smd: 1(-0.65,0) 2(0.65,0)
  silkscreen extent -1.4,-0.25 -1.4,0.25
"smd C0603" [mm] "Chip Capacitor; Body 1.6 x 0.8 mm (LxW typ)"
  rect 1.1x1 smd: 1(-0.85,0) 2(0.85,0)
  silkscreen extent -1.7,-0.4 -1.7,0.4
"smd C0603_0.45" [mm] "Chip Capacitor; Body 1.6 x 0.8 mm (LxW typ)"
  rect 1.1x1 smd: 1(-0.85,0) 2(0.85,0)
  silkscreen extent -1.7,-0.4 -1.7,0.4
"smd C0603_0.80" [mm] "Chip Capacitor; Body 1.6 x 0.8 mm (LxW typ)"
  rect 1.1x1 smd: 1(-0.85,0) 2(0.85,0)
  silkscreen extent -1.7,-0.4 -1.7,0.4
"smd C0805" [mm] "Chip Capacitor; Body 2.0 x 1.2 mm (LxW typ)"
  rect 1.3x1.5 smd: 1(-0.95,0) 2(0.95,0)
  silkscreen extent -1.9,-0.65 -1.9,0.65
"smd C0805_0.50" [mm] "Chip Capacitor; Body 2.0 x 1.2 mm (LxW typ)"
  rect 1.3x1.5 smd: 1(-0.95,0) 2(0.95,0)
  silkscreen extent -1.9,-0.65 -1.9,0.65
"smd C0805_0.60" [mm] "Chip Capacitor; Body 2.0 x 1.2 mm (LxW typ)"
  rect 1.3x1.5 smd: 1(-0.95,0) 2(0.95,0)
  silkscreen extent -1.9,-0.65 -1.9,0.65
"smd C0805_1.30" [mm] "Chip Capacitor; Body 2.0 x 1.2 mm (LxW typ)"
  rect 1.3x1.5 smd: 1(-0.95,0) 2(0.95,0)
  silkscreen extent -1.9,-0.65 -1.9,0.65
"smd C1206 polar" [mm] "Chip Capacitor; Body 3.2 x 1.6 mm (LxW typ)"
  round 0.5 on Top Overlay: 0(-1.5,-1.5)
  rect 1.6x1.8 smd: 1(-1.4,0) 2(1.4,0)
  silkscreen extent -0.3,-0.8 0.3,0.8
"smd KTL 5x3.2" [mm] "smd Kristal 5x3.2mm"
  oct 2x1.2 smd: 1(0,0)
  rect 2x1.2 smd: 2(3.7,0) 3(3.7,2.2) 4(0,2.2)
  silkscreen extent -0.65,-1.7 4.35,2.7
"smd MSOP/8" [mil]
  rect 15x45 smd: 1(-38.39,-86.61) 2(-12.79,-86.61) 3(12.81,-86.61) 4(38.41,-86.61) 5(38.39,86.61) 6(12.79,86.61) 7(-12.81,86.61) 8(-38.41,86.61)
  silkscreen extent -60,-59 60,61
"smd R EXB38v" [mm] "Panasonic EXB38V resistor network 0603"
  rect 0.65x0.7 smd: 1(-1.2,-0.8) 2(-1.2,0.8) 7(1.2,-0.8) 8(1.2,0.8)
  rect 0.45x0.7 smd: 3(-0.4,-0.8) 4(-0.4,0.8) 5(0.4,-0.8) 6(0.4,0.8)
  silkscreen extent -1.73,-0.4 1.73,0.4
"SMD SC-70 (6-pin)" [mil]
  round 15.75 on Top Overlay: 0(-55.12,-39.37)
  rect 12x40 smd: 1(-25,-50) 2(0,-50) 3(25,-50) 4(25,50) 5(0,50) 6(-25,50)
  silkscreen extent -40,-25 40,25
"smd soicn/8" [mil]
  rrect10% 20x70 smd paste+0 mask+0: 1(-75,-110)
  oval 20x70 smd paste+0 mask+0: 2(-25,-110) 3(25,-110) 4(75,-110) 5(75,110) 6(25,110) 7(-25,110) 8(-75,110)
  silkscreen extent -97,-77 97,77
"smd SOT-23" [mil]
  rect 40x40 smd paste+0 mask+0: 1(-38,-44) 2(38,-44) 3(-1,44)
  silkscreen extent -58,-20 58,26
"smd SOT-457" [mm]
  rect 0.5x0.7 smd: 1(-0.95,-1.325) 2(0,-1.325) 3(0.95,-1.325) 4(0.95,1.325) 5(0,1.325) 6(-0.95,1.325)
  round 0.5 on Top Overlay: 7(-1,-0.25)
  silkscreen extent -1.5,-0.75 1.5,0.75
"smd U.FL" [mm] "Hirose U.FL smt RF connector"
  rect 1.05x2.2 smd: 0(-1.475,0) 0(1.475,0)
  rect 1x1.05 smd: 1(0,1.502)
  silkscreen extent -0.5,-1.3 0.5,0.5, body extent -1.3,-1.3 1.3,1.3, height 1.25
"SO23-5 TI" [mm] "SOT23, 5-Leads, Body 3,0x3,0mm (max), Pitch 0,95mm, IPC Medium Density"
  rect 1.1x0.6 smd: 1(-1.2,0.95) 2(-1.2,0) 3(-1.2,-0.95) 4(1.2,-0.95) 5(1.2,0.95)
  silkscreen extent -1.32,-1.5 0.25,1.92, body extent -0.87,-1.52 0.87,1.53, height 1.1
SOIC127P600X175-8N [mm] "SOIC, 8-Leads, Body 4,9x4,0mm (max), Pitch 1,27mm, IPC Medium Density"
  oval 1.75x0.6 smd: 1(-2.625,1.905) 2(-2.625,0.635) 3(-2.625,-0.635) 4(-2.625,-1.905) 5(2.625,-1.905) 6(2.625,-0.635) 7(2.625,0.635) 8(2.625,1.905)
  silkscreen extent -2.75,-2.45 1.35,2.88, body extent -1.97,-2.47 1.97,2.47, height 1.75
SOT95P230X110-3N [mm] "SOT23, 3-Leads, Body 3,0x2,5mm (max), Pitch 0,95mm, IPC Medium Density"
  rect 1.4x0.6 smd: 1(-0.95,0.95) 2(-0.95,-0.95) 3(0.95,0)
  silkscreen extent -1.07,-1.5 0.7,1.93, body extent -0.7,-1.5 0.7,1.5, height 1.1
SOT223 [mil]
  rect 59x79 smd: 1(-91,-107) 2(0,-107) 3(91,-107)
  rect 150x79 smd: 4(0,141)
  silkscreen extent -141,-161 143,200, body extent -131,-105 135,162, height 51
TSOP65P640X100-16M [mm] "TSOP, 16-Leads, Body 5,1x4,5mm (max), Pitch 0,65mm, IPC Low Density"
  oval 2x0.35 smd: 1(-2.9,2.275) 2(-2.9,1.625) 3(-2.9,0.975) 4(-2.9,0.325) 5(-2.9,-0.325) 6(-2.9,-0.975) 7(-2.9,-1.625) 8(-2.9,-2.275) 9(2.9,-2.275) 10(2.9,-1.625) 11(2.9,-0.975) 12(2.9,-0.325) 13(2.9,0.325) 14(2.9,0.975) 15(2.9,1.625) 16(2.9,2.275)
  silkscreen extent -3.02,-2.55 1.5,3.12, body extent -2.25,-2.55 2.25,2.55, height 1
TSQFP50P900X900X160-48N [mm] "TSQFP, 48-Leads, Body 9,2x9,2mm (max), Pitch 0,50mm, IPC Medium Density"
  oval 1.75x0.3 smd: 1(-4.075,2.75) 2(-4.075,2.25) 3(-4.075,1.75) 4(-4.075,1.25) 5(-4.075,0.75) 6(-4.075,0.25) 7(-4.075,-0.25) 8(-4.075,-0.75) 9(-4.075,-1.25) 10(-4.075,-1.75) 11(-4.075,-2.25) 12(-4.075,-2.75) 25(4.075,-2.75) 26(4.075,-2.25) 27(4.075,-1.75) 28(4.075,-1.25) 29(4.075,-0.75) 30(4.075,-0.25) 31(4.075,0.25) 32(4.075,0.75) 33(4.075,1.25) 34(4.075,1.75) 35(4.075,2.25) 36(4.075,2.75)
  oval 0.3x1.75 smd: 13(-2.75,-4.075) 14(-2.25,-4.075) 15(-1.75,-4.075) 16(-1.25,-4.075) 17(-0.75,-4.075) 18(-0.25,-4.075) 19(0.25,-4.075) 20(0.75,-4.075) 21(1.25,-4.075) 22(1.75,-4.075) 23(2.25,-4.075) 24(2.75,-4.075) 37(2.75,4.075) 38(2.25,4.075) 39(1.75,4.075) 40(1.25,4.075) 41(0.75,4.075) 42(0.25,4.075) 43(-0.25,4.075) 44(-0.75,4.075) 45(-1.25,4.075) 46(-1.75,4.075) 47(-2.25,4.075) 48(-2.75,4.075)
  silkscreen extent -4.2,-2.8 2.8,3.62, body extent -3.5,-3.5 3.5,3.5, height 1.6
USB-B [mil]
  round 55 hole 35: 1(0,0) 2(-98.42,0) 3(-98.42,-78.74) 4(0,-78.74)
  round 150 hole 90.55: 5(-286.22,-185.43) 6(187.8,-185.43)
  silkscreen extent -285,-590 187,79, body extent -343,-590 243,80, height 437
X1G004691000112 [mm]
  rrect50% 0.6x0.75 smd: 1(-0.825,-0.565) 2(0.825,-0.565) 3(0.825,0.565) 4(-0.825,0.565)
  silkscreen extent -1.65,-1.7 1.65,1.7

## Part data
BAT1: library part NX3008NBK
C01CPU C001LO C02CPU C002LO C03CPU C003LO C004LO C005LO C06CPU C006LO C09CPU C10CPU C11CPU C023LO C029LO C030LO C031LO C032LO C033LO C34LO C035LO C49 C51 C54 C68 C69 C73HF C74HF C75HF C80HF C81HF C84HF: library part CSMD603/100nF, "smd capaciteit, verp.0603, 100nF", Component Type=Standard, Designator=CSMD603/100nF, Part Number=CSMD603/100nF, Pin Count=2
  C01CPU C001LO C02CPU C002LO C03CPU C003LO C004LO C005LO C06CPU C006LO C09CPU C10CPU C11CPU C023LO C029LO C030LO C031LO C032LO C033LO C34LO C035LO C49 C51 C54 C73HF C74HF C75HF C80HF C81HF C84HF: Supplier 1=Farnell
C001Mx C002Mx C006Mx: "smd capaciteit, verp.0402, 100nF", Component Type=Standard, Designator=CSMD402/100nF, Part Number=CSMD402/100nF, Pin Count=2, Supplier 1=Farnell
C003Mx: "smd capaciteit, verp.0402, 1.5nF", Component Type=Standard, Designator=CSMD402/1.5nF, Part Number=CSMD402/1.5nF, Pin Count=2, Supplier 1=Farnell
C04CPU C05CPU C76HF C77HF C78HF C79HF C82HF C83HF: library part CSMD603/10pF, "smd capaciteit, verp.0603, 10pF", Component Type=Standard, Designator=CSMD603/10pF, Part Number=CSMD603/10pF, Pin Count=2, Supplier 1=Farnell
C004Mx: "smd capaciteit, verp.0402, 100pF", Component Type=Standard, Designator=CSMD402/100pF, Part Number=CSMD402/100pF, Pin Count=2, Supplier 1=Farnell
C005Mx C014LO C015LO C016LO: library part CSMD603/1uF, "smd capaciteit, verp.0603, 1uF", Part Number=CSMD603/18nF, Component Type=Standard, Designator=CSMD603/18nF, Pin Count=2
  C005Mx: Supplier 1=Farnell
C07CPU C08CPU: library part CSMD1206/10uF/10V, "smd capaciteit, tantalium, verp.1206, 10uF/10V", Component Type=Standard, Designator=CSMD1206/10uF/10V, Part Number=CSMD1206/10uF/10V, Pin Count=2, Supplier 1=Farnell
C007LO C017LO C52 C53 C55 C56 C57 C58 C60 C61 C62 C63 C66 C67: library part CSMD402/22pF, "smd capaciteit, verp.0402, 22pF", Component Type=Standard, Designator=CSMD402/22pF, Part Number=CSMD402/22pF, Pin Count=2, Supplier 1=Farnell
C008LO C009LO C010LO C011LO C012LO C013LO C022LO C50: library part CSMD402/100nF, "smd capaciteit, verp.0402, 10nF", Component Type=Standard, Designator=CSMD402/100nF, Part Number=CSMD402/100nF, Pin Count=2, Supplier 1=Farnell
C018LO C019LO C020LO: library part CSMD603/12nF, "smd capaciteit, verp.0603, 12nF", Component Type=Standard, Designator=CSMD603/12nF, Part Number=CSMD603/12nF, Pin Count=2
C021LO C024LO C027LO: library part CSMD805/1uF, "smd capaciteit, verp.0805, 1uF"
C025LO C026LO C028LO: library part CSMD805/330nF, "smd capaciteit, verp.0805, 330nF", Component Type=Standard, Designator=CSMD805/330nF, Part Number=CSMD805/330nF, Pin Count=2
C59: library part CSMD402/100nF, "smd capaciteit, verp.0402, 100nF", Component Type=Standard, Part Number=CSMD402/100nF, Pin Count=2, Supplier 1=Farnell
C64 C65 C70 C71 C72 C85 C86: library part CSMD603/100pF, "smd capaciteit, verp.0603, 100pF", Component Type=Standard, Designator=CSMD603/100pF, Part Number=CSMD603/100pF, Pin Count=2, Supplier 1=Farnell
C70Mx: "smd capaciteit, verp.0402, 1nF", Component Type=Standard, Designator=CSMD402/1nF, Part Number=CSMD402/1nF, Pin Count=2, Supplier 1=Farnell
CLK: library part HSMH-C190, "led smd rood, Avago Techn., HSMH-C190", Supplier 1=Farnell
CON_I2C: "header 1x3, JST B3B-PH-K-S", Component Type=Standard, Part Number="CON HDR1X3/JST/B3BPHKS", Pin Count=3, Supplier 1=Farnell
GPS1: library part "CON HDR 2x4", "pcb header recht 2x4  pitch 100mil", Component Type=Standard, Designator="CON HDR 2x4", Part Number="CON HDR 2x4", Pin Count=8, Supplier 1=Farnell
HIGH LOW MID SDR1 SW_HF: library part "CON SMA", "SMA connector, rechtop", Component Type=Standard, Designator="CON SMA", Part Number="CON SMA", Pin Count=5, Supplier 1=Farnell
L01CPU L001LO L5HF: library part "Ferrite 0805", "Ferrite bead, 0805 package", Supplier 1=Farnell
L5Mx: "smd spoel, verpakking 805, 470nH", Supplier 1=Farnell
L6HF L7HF L8HF L9HF L10HF: library part SPL805/250nH, "smd spoel, verpakking 805, 250nH", Supplier 1=Farnell
L6Mx: library part SPL603/82nH, Manufacturer part number=0603CS-82NXGLW, Supplier Part Number 1=994-0603CS-82NXGLW, Series=https://www.coilcraft.com/0603cs.cfm, Supplier 1=Mouser
LOCK: "led smd groen, Avago Techn., HSMG-C190", Supplier 1=Farnell
MIX: "led smd geel, Avago Techn., HSMY-C190", Supplier 1=Farnell
R01CPU R02CPU R03CPU R04CPU: library part 470R/603, "weerstand SMD603, 470R", Supplier 1=Farnell
R001LO: library part 5K1/603, "weerstand SMD603, 5K1"
R002LO R003LO R012LO R018LO: library part 270R/805, "weerstand SMD805, 270R"
R004LO R005LO R009LO: library part 47K/402, "weerstand SMD402, 47K"
R05CPU R06CPU: library part 1K5/603, "weerstand SMD603, 1K5", Supplier 1=Farnell
R6LO: library part 22R/Network4/603, "weerstandsnetwerk SMD603, 4x 22R", Supplier 1=Farnell
R7 R8 R27 R28 R30 R32: library part 750R/603, "weerstand SMD603, 750R", Supplier 1=Farnell
R07CPU R08CPU: library part 22R/603, "weerstand SMD603, 22R", Supplier 1=Farnell
R010LO R011LO R039LO: library part 240K/603, "weerstand SMD603, 240K"
R013LO R014LO R015LO R016LO R017LO: library part 100K/603, "weerstand SMD603, 100K", Supplier 1=Farnell
R31 R040LO R041LO: library part 1K8/805, "weerstand SMD805, 1K8"
R33HF R35HF: library part 10K/603, "weerstand SMD603, 10K", Supplier 1=Farnell
R34HF R37HF R38HF: library part 51R/603, "weerstand SMD603, 51R", Supplier 1=Farnell
R36HF: library part 390R/603, "weerstand SMD603, 390R", Supplier 1=Farnell
R_U11pol: "weerstand SMD402, 20R", Supplier 1=Farnell
REF: library part "CON HRS/SMA/ U.FL-R-SMT(01)", "connector Hirose, U.FL serie, U.FL-R-SMT(01)", Supplier 1=Farnell
SAW1: "Saw Filter", Manufacturer=TDK, Manufacturer part number=B39162B3522U410
T2HF: "PNP transistor, smd", Supplier 1=Farnell
U2: library part DAC081C085CIMM/NOPB, "12-Bit Micro Power DAC with I2C interface", Supplier 1=Farnell
U3: library part MCP602-E/SN, "Dual 2.7V to 6.0V Single Supply CMOS Op Amp"
U4: library part LM4120
U5: "±0.25°C Typical Accuracy Digital Temperature Sensor", Supplier 1=Farnell
U6: library part NC7SV157P6X, "TinyLogic  2-Input Non-Inverting Multiplexer"
U7_CPU: library part STM32F100xx
U8_CPU: "Dual USB 2.0 integrated ESD protection", Supplier 1=Farnell
U11: "RF Amplifier", Manufacturer=rfmd/Qorvo, MPN=SBB3089ZSR
U16: "SPDT-J2/J1 to RFC", Manufacturer=Skyworks
U20: "Gain block", Manufacturer="Analog Devices", Manufacturer part number=ADL5602ARKZ-R7
USB: "led smd rood, Avago Techn., HSMH-C190", Supplier 1=Farnell
USB-B: "USB B DEVICE CONNECTOR", Text Field1=Assmann, Text Field2=AU-Y1007, Text Field3=Digi-Key, Text Field4=AE1085-ND, Text Field5=Thru-Hole, Text Field6=1.168
X2_CPU: library part "KTL/5x3.2mm 16MHz", "TXC Xtal 16.000 MHz, 5x3.2mm", Component Type=Standard, Designator="KTL/5x3.2mm 16MHz", Part Number="KTL/5x3.2mm 16MHz", Pin Count=4, Supplier 1=Farnell
L4: Supplier 1=Farnell

## Via types
v1: diameter 0.7, hole 0.4, Top Layer to Bottom Layer, 458 vias
v2: diameter 0.6, hole 0.25, Top Layer to Bottom Layer, 82 vias
v3: diameter 0.66, hole 0.33, Top Layer to Bottom Layer, tented top, 13 vias
v4: diameter 1.27, hole 0.711, Top Layer to Bottom Layer, 3 vias
v5: diameter 0.8, hole 0.4, Top Layer to Bottom Layer, 2 vias
v6: diameter 0.6, hole 0.3, Top Layer to Bottom Layer, 2 vias

## Nets (pads, with @x,y where several pads share a name; then routed paths per layer and width w, separated by ;. In a path a pad name is that pad's centre, name@x,y a point inside that pad or via, vN(x,y) a via of type N, cw(c..) or ccw(c..) an arc to the next point about the centre after c; other vN are vias at no path point)
3V3: C01CPU.2 C001LO.2 C02CPU.2 C002LO.2 C03CPU.2 C003LO.2 C004LO.2 C005LO.2 C006LO.2 C008LO.2 C009LO.2 C10CPU.2 C010LO.2 C11CPU.2 C011LO.2 C012LO.2 C013LO.2 C022LO.2 C023LO.2 C029LO.2 C031LO.2 C032LO.2 C033LO.2 C50.2 C51.2 C68.2 C69.1 L01CPU.2 R02CPU.2 R03CPU.2 R04CPU.2 R004LO.2 R005LO.2 R012LO.1 R31.1 R040LO.2 R041LO.1 U1.6 U1.10 U1.16 U1.17 U1.26 U1.28 U1.32 U2.6 U3.6 U3.8 U4.3 U4.4 U5.8 U6.5 U7_CPU.1 U7_CPU.9 U7_CPU.24 U7_CPU.36 U7_CPU.48 U12.9 U14.1 U14.16 | length 104.2
  Top Layer w0.2: C029LO.2@23.961,17.507 24.011,17.557 U4.3@25.661,17.557 ; U4.3@25.661,17.507 29.911,17.507 R012LO.1@29.961,17.557 31.093,17.557 v2(31.2,17.45) ; C031LO.2@36.736,11.642 37.05,11.328 R040LO.2@37.05,7.9 R041LO.1@37.05,5.8 ; C031LO.2@36.8,11.65 37.824,11.65 v6(38.32,11.154) ; C033LO.2@44.15,18.8 C033LO.2@44.211,18.8 ; v2@45.525,27.575 46.236,28.286 C51.2@46.236,28.842 C50.2@46.236,30.092 U12.9@46.236,31.342 ; v2(50,32.35) v2@50.058,32.292 ; C003LO.2@51.436,31.092 C012LO.2@51.436,29.892 51.986,29.892 52.294,30.2 ; U1.17@53.175,30.2 52.294,30.2 ; U1.16@53.95,30.975 52.669,30.975 52.386,30.692 52.386,30.292 52.294,30.2 ; U1.26@54.45,25.925 54.45,24.828 55.036,24.242 C011LO.2@55.686,24.242 ; v2(54.486,23.142) 54.586,23.142 C011LO.2@55.686,24.242 ; U1.28@55.45,25.925 55.45,25.328 55.686,25.092 C011LO.2@55.686,24.242 ; U1.10@56.95,30.975 56.95,31.35 57.842,32.242 C004LO.2@58.086,32.242 58.642,32.242 58.9,32.5 58.9,33.042 v2(58.886,33.056) 58.886,35.136 ; U1.32@57.45,25.925 C008LO.2@57.45,24.35 57.678,24.35 58.186,23.842 ; U1.6@58.225,29.2 59.55,29.2 C009LO.2@59.8,28.95 60.736,28.014 v2(60.736,27.792) ; v2(58.686,23.764) C001LO.2@58.7,23.75
  Top Layer w0.22: C032LO.2@44.25,20.6 ccw(c44.3,20.6) C032LO.2@44.3,20.55
  Top Layer w0.25: U2.6@15.886,11.567 17.383,11.567 17.9,11.05 17.9,9.35 C010LO.2@17.55,9 v2(17.55,7.65) ; U3.8@16.981,20.436 16.981,21.431 17.65,22.1 C022LO.2@19.521,22.1 ; v2(19.6,24.3) 19.65,24.25 C023LO.2@19.65,23.3 19.521,23.171 C022LO.2@19.521,22.1 ; U3.6@19.65,20.229 19.521,20.1 U3.6@19.521,20.436 C022LO.2@19.521,22.1 ; C022LO.2@19.65,22.1 C022LO.2@19.521,22.1 ; v2(22.35,28.95) 22.7,28.6 C69.1@22.7,27.55 22.9,27.75 R31.1@24.6,27.75 ; R31.1@24.975,27.375 U14.1@27.7,27.375 U14.16@33.5,27.375 ; U5.8@35.236,11.768 36.61,11.768 C031LO.2@36.736,11.642 ; C02CPU.2@52.5,7.85 C02CPU.2@52.7,7.85 ; v2(52.65,15.3) 53.1,15.75 C01CPU.2@53.1,16.35 53.675,16.35 U7_CPU.24@54.15,15.875 ; U7_CPU.36@52.7,8.925 C02CPU.2@52.7,7.85 ; v2(53.45,7.65) 53.25,7.85 C02CPU.2@52.7,7.85 ; v2(59.2,13.05) U7_CPU.9@60.975,13.05 61.9,13.05 62.2,13.35 62.2,15.7 63.9,17.4 C68.2@64.05,17.4 ; U7_CPU.48@59.65,7.725 60.225,7.725 C03CPU.2@61.1,6.85 ; U7_CPU.1@60.975,9.05 61.1,8.925 C03CPU.2@61.1,6.85 ; v2(62.2,7.35) 61.7,6.85 C03CPU.2@61.1,6.85 ; R02CPU.2@72.096,6.754 R03CPU.2@72.096,8.354 ; R04CPU.2@72.096,9.954 R03CPU.2@72.096,8.354 ; v2(73.15,8.35) 73.146,8.354 R03CPU.2@72.096,8.354
  Top Layer w0.4: C11CPU.2@13.65,52.2 13.725,52.275 15.475,52.275 L01CPU.2@15.475,51.125
  Top Layer w0.5: C11CPU.2@13.65,52.2 v2(13.65,53.5) ; U6.5@42.331,16.857 43.711,16.857 44.211,17.357 44.211,18.8 44.211,20.057 ; v2@50.058,32.292 R004LO.2@51.036,32.292 51.25,32.078 51.25,31.278 C003LO.2@51.436,31.092
  Top Layer w0.7: C032LO.2@44.3,20.55 v2(45.2,20.55)
  other v2: 45.5,27.5 54.076,37.626
3V3RF_L01CPU: C08CPU.1 C09CPU.2 L01CPU.1 U9_CPU.2 U9_CPU.4 | length 13.7
  Top Layer w0.4: L01CPU.1@15.475,49.225 15.875,49.225 16.65,48.45 C09CPU.2@17.2,48.45
  Top Layer w0.5: C09CPU.2@17.2,48.45 17.95,47.7 C08CPU.1@19,47.7 19.1,47.6 U9_CPU.4@22.219,47.6
  Top Layer w1: U9_CPU.4@22.219,47.6 U9_CPU.2@28.518,47.6
5V: C003Mx.1 C004Mx.1 C005Mx.2 C07CPU.1 C54.2 C85.2 GPS1.2 L5Mx.2 R01CPU.2 R_U11pol.1 T2HF.2 U8_CPU.5 U9_CPU.3 U16.1 USB-B.1 | length 199.2
  Top Layer w0.22: C54.2@36,36.2 C54.2@36,36.25 ; C85.2@37.3,36.25 C85.2@37.7,36.25 ; U16.1@39.275,31.725 U16.1@39.287,31.725
  Top Layer w0.25: U16.1@39.287,31.725 v1(40.175,31.725)
  Top Layer w0.5: R_U11pol.1@32.2,36.75 33.05,36.75 v2(33.15,36.65) 33.6,36.2 C54.2@36,36.2 ; C85.2@37.7,36.25 39.4,36.25 v1(40,35.65) ; C005Mx.2@65.6,37.45 64.3,36.15 64.3,34.95 65.425,33.825 66.675,33.825 v4(67.05,33.45) ; v4(68.2,20.65) 69.4,20.65 70.25,19.8 71.6,19.8 72.2,20.4 72.2,21.58 72.45,21.83 76.13,21.83 USB-B.1@77.5,23.2 ; L5Mx.2@70.1,37.45 L5Mx.2@70.2,37.55 L5Mx.2@70.45,37.8 ; v2@72.096,3.954 R01CPU.2@72.096,5.154
  Top Layer w0.6: U9_CPU.3@28.518,49.911 28.806,50.2 C07CPU.1@31.3,50.2 31.3,52.05 v2(31.25,52.1) ; T2HF.2@45.704,62.207 46.296,62.8 v2(47.45,62.8)
  Top Layer w0.7: C54.2@36,36.25 C85.2@37.3,36.25 ; C005Mx.2@65.6,37.45 C004Mx.1@67.4,37.45 C003Mx.1@68.6,37.45 L5Mx.2@70.1,37.45
  Bottom Layer w0.22: 41.4,33.878 41.4,34.342
  Bottom Layer w0.5: v2(31.25,52.1) 33.15,50.2 v2(33.15,36.65) ; v1@40.092,35.65 41.4,34.342 ; v1(40.175,31.725) 40.825,31.725 41.4,32.3 41.4,33.878 ; v2(47.45,62.8) 61.6,62.8 67.4,57 67.15,56.75 67.15,33.55 v4(67.05,33.45) 67.15,33.35 67.15,24.45 68.2,23.4 v4(68.2,20.65)
  Bottom Layer w0.6: v2(31.25,52.1) 31.65,52.5 42,52.5 44.75,55.25 44.75,60.85 46.7,62.8 v2(47.45,62.8)
  Bottom Layer w0.7: GPS1.2@41.19,6.13 41.19,4.26 43.05,2.4 70.75,2.4 v2@72.075,3.725 ; v4@71.05,19.75 74.6,16.2 74.6,3.8 v2(72.1,3.8)
  other v4: 70.9,19.75
ANT1: R27.2 U14.4 | length 23.6
  Top Layer w0.25: v2(10.45,31.4) 10.95,30.9 R27.2@11.35,30.9 ; v2(18.65,25.3) 18.7,25.3 19.125,24.875 20.675,24.875 20.7,24.85 25.65,24.85 26.225,25.425 U14.4@27.7,25.425
  Bottom Layer w0.25: v2(10.45,31.4) 11.9,31.4 13.3,30 13.3,26.05 14.05,25.3 v2(18.65,25.3)
ANT2: R8.1 U14.5 | length 26.2
  Top Layer w0.25: v2(10.15,34.7) 10.25,34.8 R8.1@11.35,34.8 ; v2(20.5,24.25) 20.5,24.45 25.816,24.45 26.141,24.775 U14.5@27.7,24.775
  Bottom Layer w0.25: v2(10.15,34.7) 10.15,33.9 13.9,30.15 13.9,26.3 14.35,25.85 18.387,25.85 18.412,25.875 18.888,25.875 20.5,24.263 v2(20.5,24.25)
BSEL: R7.1 U14.12 | length 6.1
  Top Layer w0.2: U14.12@33.5,24.775 36.875,24.775 37.5,25.4 37.5,27.05 R7.1@37.35,27.2
CLK_LED: CLK.2 U7_CPU.38 | length 17.9
  Top Layer w0.32: U7_CPU.38@54.65,7.725 54.65,4.05 56.45,2.25 63.2,2.25 64.85,3.9 64.85,4.5 65.504,5.154 CLK.2@66.555,5.154
CPU_LOCK_LED: LOCK.2 U7_CPU.40 | length 18.2
  Top Layer w0.32: U7_CPU.40@55.65,7.725 55.65,4.6 56.8,3.45 62.65,3.45 63.7,4.5 63.7,7.4 64.654,8.354 LOCK.2@66.555,8.354
CPU_MIX_LED: MIX.2 U7_CPU.41 | length 18.5
  Top Layer w0.32: U7_CPU.41@56.15,7.725 56.15,4.95 57.15,3.95 62.3,3.95 63.096,4.746 63.096,8.846 64.204,9.954 MIX.2@66.555,9.954
CPU_OSC_IN: C04CPU.2 U7_CPU.5 X2_CPU.3 | length 4.8
  Top Layer w0.2: U7_CPU.5@60.975,11.05 63.1,11.05 63.55,11.5 X2_CPU.3@65.6,11.5